# Altium PCB xvf300_core_board.PcbDoc
Units mm, origin at the board's own origin, x right, y up, seen from the top; angles counter-clockwise.
Board outline 76.54 x 75.31 mm, 2 copper layers (Top Layer, Bottom Layer); 154 components, 112 nets, 583 pads, 283 vias.
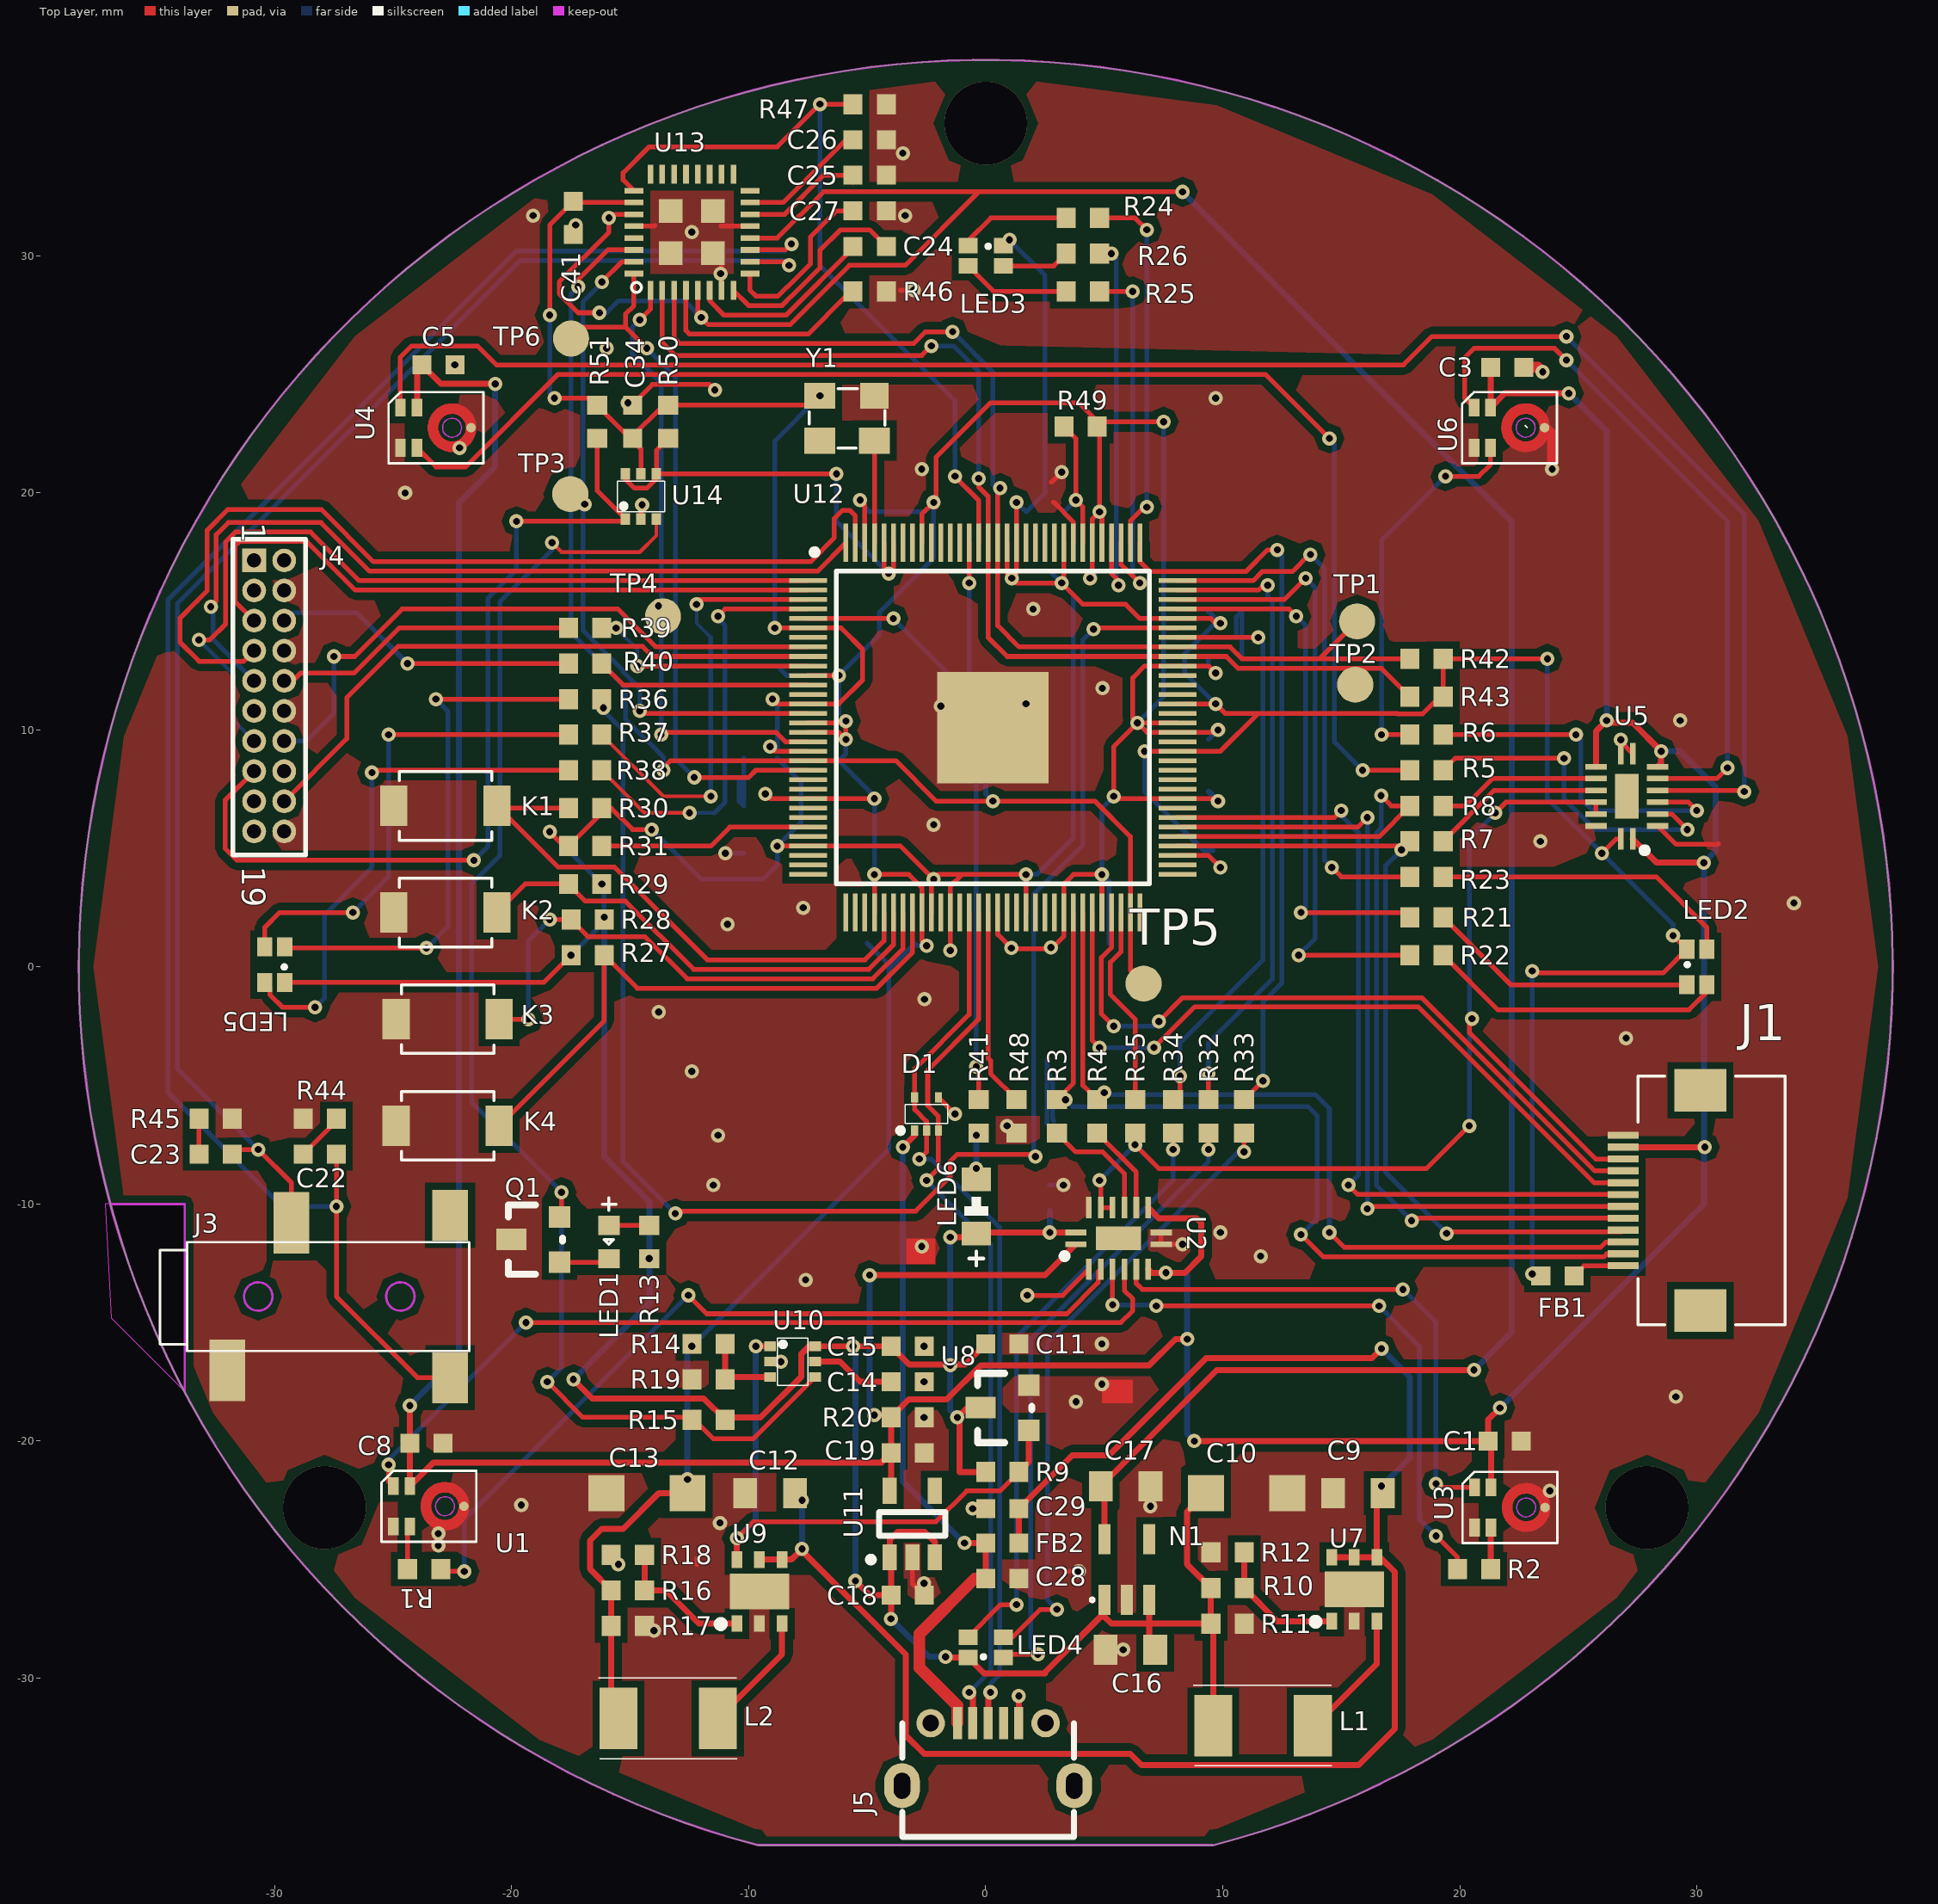
[diagram p0: Top Layer view]
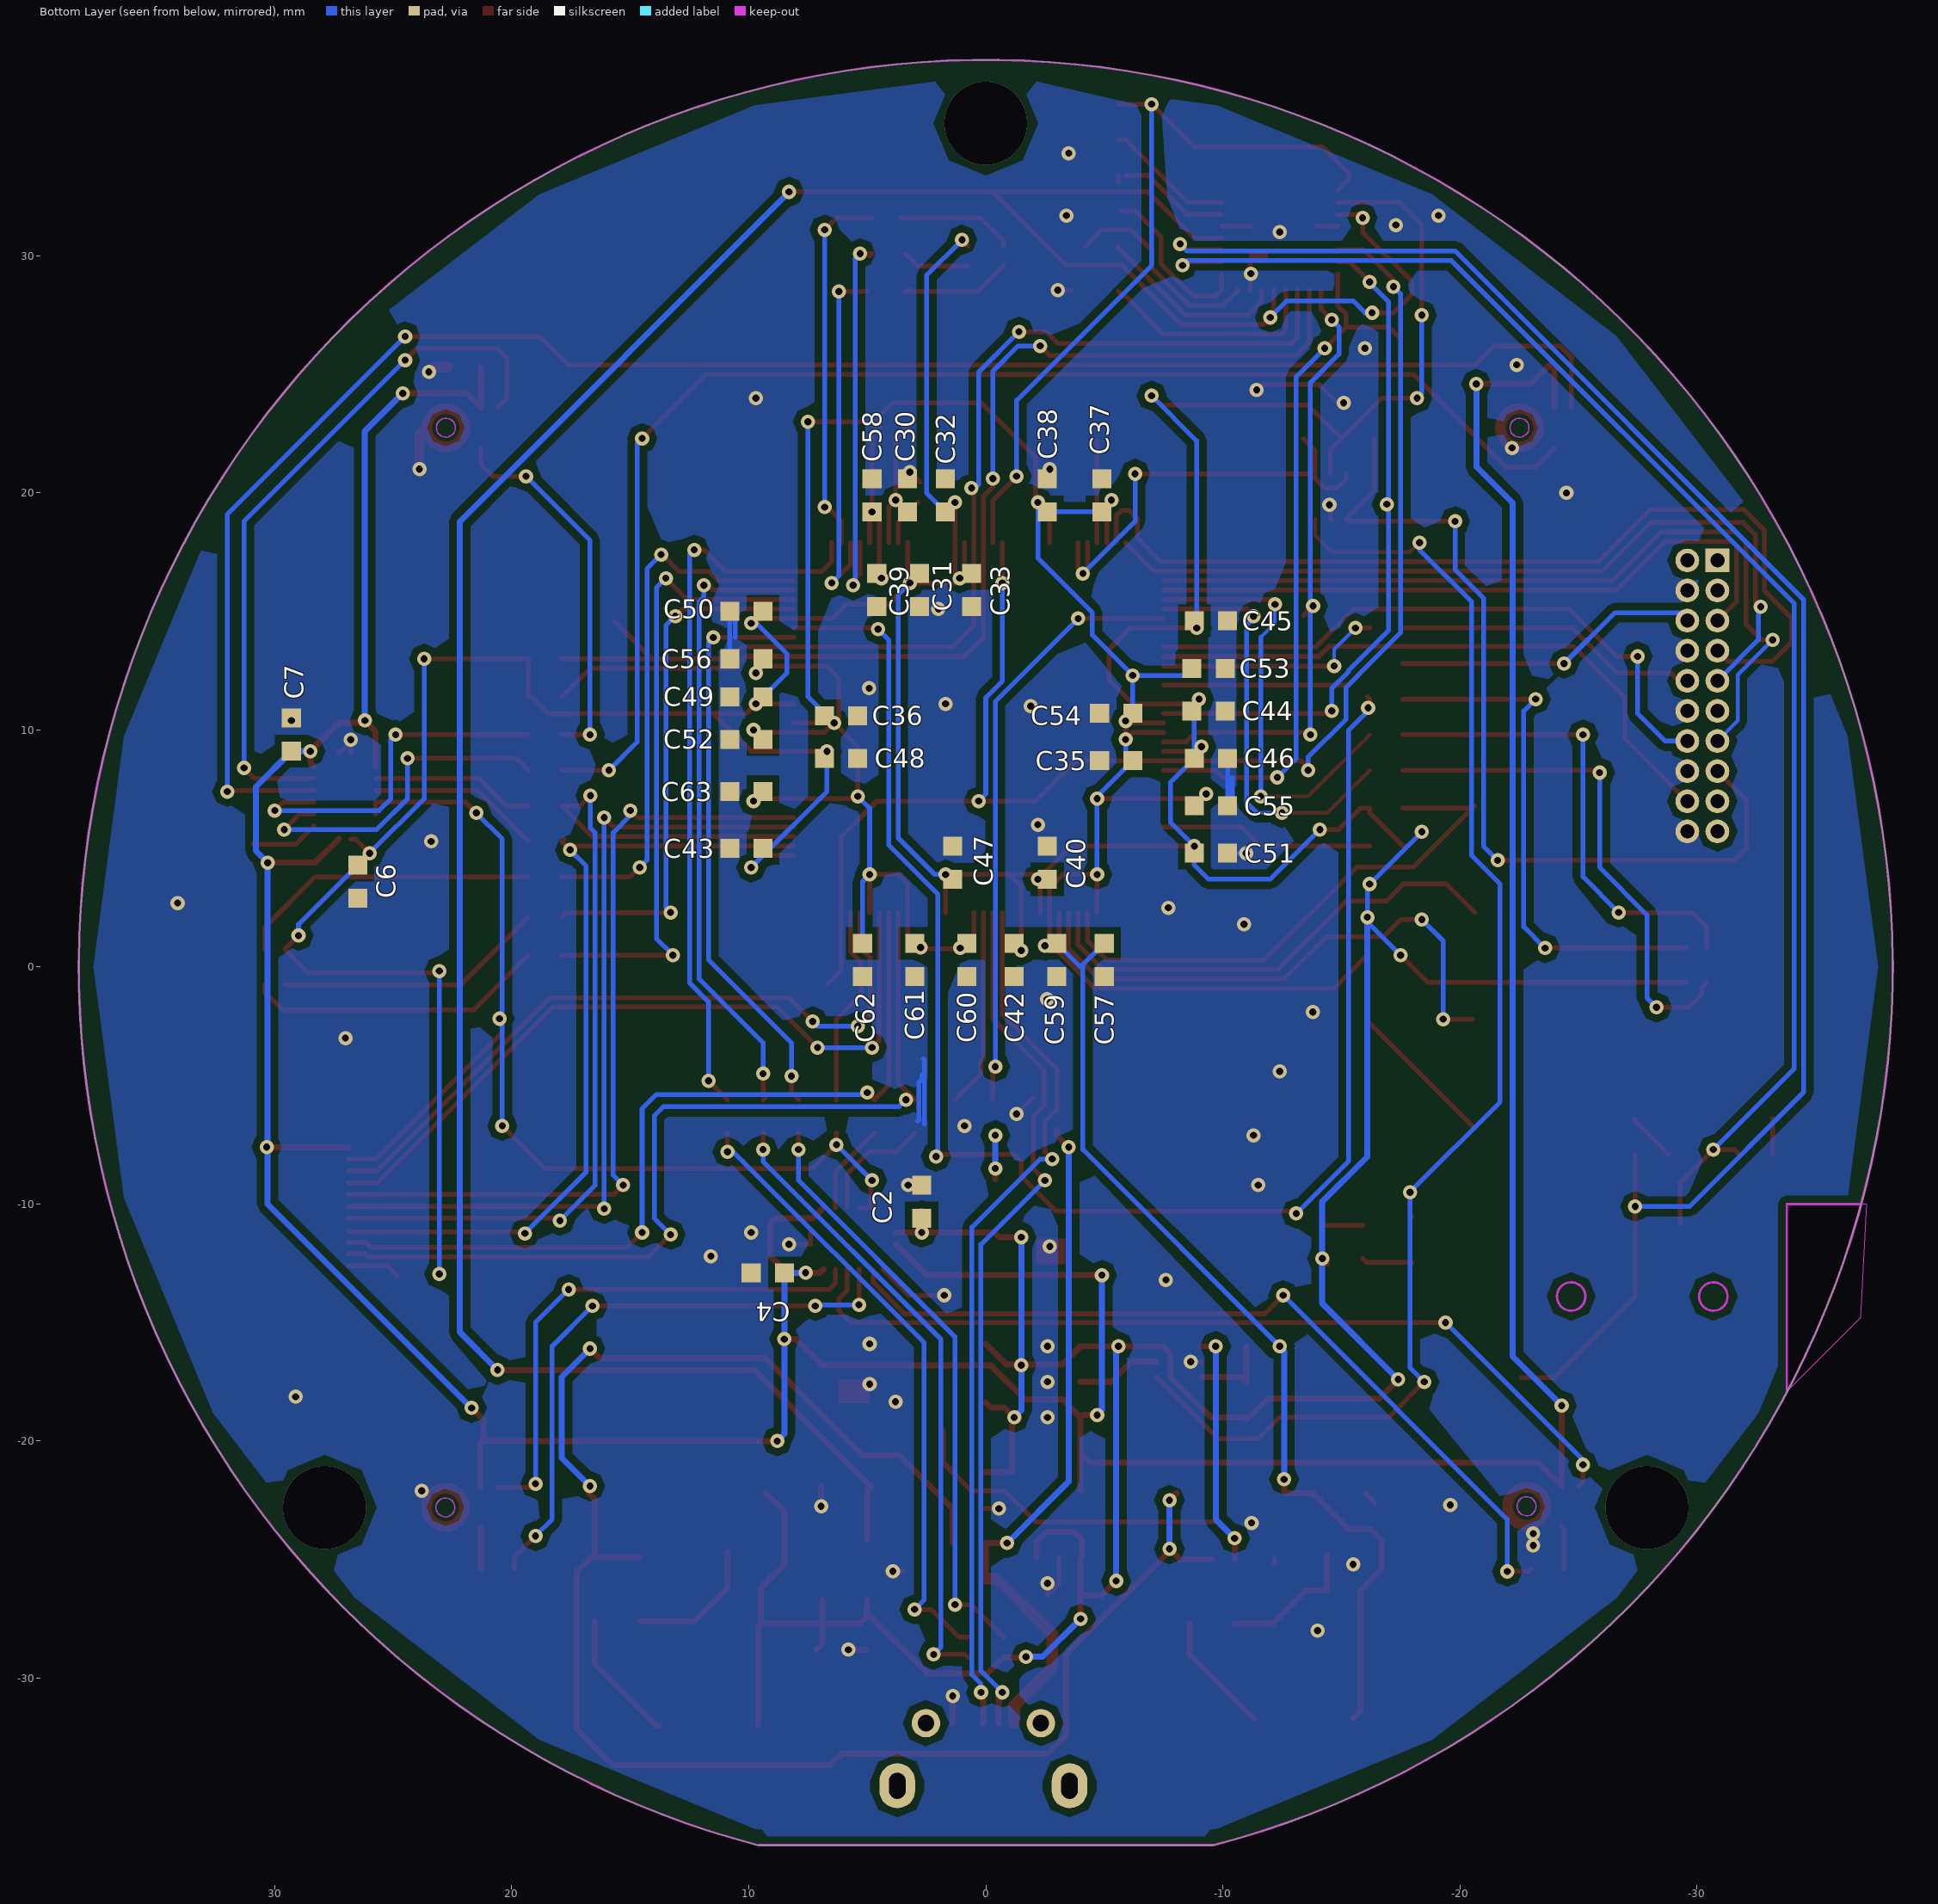
[diagram p1: Bottom Layer view, seen from below]

## Layer stack, top to bottom
Top Layer: signal copper 0.0356
Dielectric: dielectric 0.32, FR-4, Dk 4.8
Bottom Layer: signal copper 0.0356

## Board outline
-9.611,-37.043 cw(c0,0) 9.601,-37.046 9.601,-37.043
cut-out: -33.8,-10 -37.16,-10 -36.9,-14.8 -33.8,-17.9

## Design rules (kind name [scope] priority, off if disabled: settings)
Clearance [All] p1: gap=0.15
PolygonConnect [All] p1: connectstyle=Direct reliefconductorwidth=0.254 reliefentries=4 polygonreliefangle="90 Angle"
RoutingVias [All] p1: holewidth=0.3 width=0.6 viastyle="Through Hole" minholewidth=0.3 minwidth=0.6 maxholewidth=0.711 maxwidth=1.27
SilkscreenOverComponentPads SilkToSolderMaskClearance [IsPad] p1: minsilkscreentomaskgap=0.254
SolderMaskExpansion [All] p1: expansion=0.102
Width Width_5V [InNet('5V') or InNet('3V3')  or InNet('1V0') or InNet('2V5')  or InNet('1V8') or InNet('VBUS')] p1: maxlimit=1 minlimit=0.2 preferedwidth=0.5 minimp=50.000000 maximp=50.000000 favimp=50.000000
Width [All] p2: maxlimit=1 minlimit=0.152 preferedwidth=0.254 minimp=50.000000 maximp=50.000000 favimp=50.000000
27 further rules are at their usual default settings.

## Classes and differential pairs
component class TopLevel: C28 C29 C30 C31 C32 C33 C34 C35 C36 C37 C38 C39 C40 C41 C42 C43 C44 C45 C46 C47 C48 C49 C50 C51 C52 C53 C54 C55 C56 C57 C58 C59 C60 C61 C62 C63 D1 FB2 J4 J5 R48 R49 R50 R51 U12 U14 Y1
component class U_Microphones: C1 C2 C3 C4 C5 C6 C7 C8 R1 R2 R3 R4 R5 R6 R7 R8 U1 U2 U3 U4 U5 U6
component class U_Power: C9 C10 C11 C12 C13 C14 C15 C16 C17 C18 C19 L1 L2 LED1 N1 Q1 R9 R10 R11 R12 R13 R14 R15 R16 R17 R18 R19 R20 U7 U8 U9 U10 U11
component class "U_Tile 0": FB1 J1 K1 K2 K3 K4 LED2 LED3 LED4 LED5 LED6 R21 R22 R23 R24 R25 R26 R27 R28 R29 R30 R31 R32 R33 R34 R35 R36 R37 R38 R39 R40 R41
component class "U_Tile 1": C22 C23 C24 C25 C26 C27 J3 R42 R43 R44 R45 R46 R47 TP1 TP2 TP3 TP4 TP5 TP6 U13

## Components (designator, comment, footprint, x,y, rotation, side; value= is the part's Value field where it differs from the comment)
C1 "1u" C0603 21.9,-20 r0 top
C2 "100n" C0603 2.7,-9.9 r90 bottom
C3 "1u" C0603 22,25.3 r0 top
C4 "100n" C0603 9.2,-12.9 r0 bottom
C5 "1u" C0603 -23.1,25.4 r0 top
C6 "100n" C0603 26.5,3.6 r270 bottom
C7 "100n" C0603 29.3,9.8 r90 bottom
C8 "1u" C0603 -23.6,-20.1 r0 top
C9 "4u7" C0805 15.7,-22.2 r180 top
C10 "22u" C1206 11,-22.2 r0 top
C11 "100n" C0603 0.7,-15.9 r0 top
C12 "4u7" C0805 -9.1,-22.2 r180 top
C13 "22u" C1206 -14.3,-22.2 r180 top
C14 "2n2" C0603 -3.3,-17.5 r0 top
C15 "100n" C0603 -3.3,-16 r0 top
C16 "2u2" C0805 6.1,-28.8 r180 top
C17 "2u2" C0805 5.9,-21.9 r0 top
C18 "1u" C0603 -3.3,-26.5 r0 top
C19 "1u" C0603 -3.3,-20.5 r0 top
C22 "22n" C0603 -28.1,-7.9 r0 top
C23 "22n" C0603 -32.5,-7.9 r0 top
C24 "2u2" C0603 -4.9,30.4 r0 top
C25 "1u" C0603 -4.9,33.4 r0 top
C26 "1u" C0603 -4.9,34.9 r0 top
C27 "2u2" C0603 -4.9,31.9 r0 top
C28 "100n" C0603 0.7,-25.8 r0 top
C29 "100n" C0603 0.7,-22.85 r180 top
C30 "100n" C0603 3.3,19.9 r90 bottom
C31 "100n" C0603 2.8,15.9 r270 bottom
C32 "100n" C0603 1.7,19.9 r90 bottom
C33 "100n" C0603 0.6,15.9 r270 bottom
C34 "100n" C0603 -14.9,23 r90 top
C35 "100n" C0603 -5.5,8.7 r0 bottom
C36 "100n" C0603 6.1,10.6 r180 bottom
C37 "100n" C0603 -4.9,19.9 r90 bottom
C38 "100n" C0603 -2.6,19.9 r90 bottom
C39 "100n" C0603 4.6,15.9 r270 bottom
C40 "100n" C0603 -2.6,4.4 r90 bottom
C41 "100n" C0603 -17.4,31.6 r270 top
C42 "100n" C0603 -1.2,0.3 r270 bottom
C43 "100n" C0603 10.1,5 r0 bottom
C44 "100n" C0603 -9.4,10.8 r180 bottom
C45 "100n" C0603 -9.5,14.6 r180 bottom
C46 "100n" C0603 -9.5,8.8 r180 bottom
C47 "100n" C0603 1.4,4.4 r90 bottom
C48 "100n" C0603 6.1,8.8 r180 bottom
C49 "100n" C0603 10.1,11.4 r0 bottom
C50 "100n" C0603 10.1,15 r0 bottom
C51 "100n" C0603 -9.5,4.8 r180 bottom
C52 "100n" C0603 10.1,9.6 r0 bottom
C53 "100n" C0603 -9.4,12.6 r180 bottom
C54 "100n" C0603 -5.5,10.7 r0 bottom
C55 "100n" C0603 -9.5,6.8 r180 bottom
C56 "100n" C0603 10.1,13 r0 bottom
C57 "100n" C0603 -5,0.3 r270 bottom
C58 "100n" C0603 4.8,19.9 r90 bottom
C59 "100n" C0603 -3,0.3 r270 bottom
C60 "100n" C0603 0.8,0.3 r270 bottom
C61 "100n" C0603 3,0.3 r270 bottom
C62 "100n" C0603 5.2,0.3 r270 bottom
C63 "100n" C0603 10.1,7.4 r0 bottom
D1 "TPD2E001" SOT-5X3 -3,-6.9 r0 top
FB1 "330R 1.2A" L0603 24.12,-13.03 r180 top
FB2 "120R 2A" L0603 0.7,-24.3 r0 top
J1 "CON12" FFC/SM0.5-2H12A 26.9,-12.6 r270 top
J3 "PJ-2008A-B" PJ-2008A-B -30.7,-13.9 r0 top
J4 "XTAG" MHDR2X10 -30.87,17.15 r270 top
J5 "USB_Micro" USB-MICRO5 0.1,-31.9 r180 top
K1 "KEY1" BUTTON6 -22.8,6.8 r180 top
K2 "KEY1" BUTTON6 -22.8,2.3 r180 top
K3 "KEY1" BUTTON6 -22.7,-2.2 r180 top
K4 "KEY1" BUTTON6 -22.7,-6.7 r180 top
L1 "2u2" L5.8X3.4 13.8,-32 r180 top
L2 "2u2" L5.8X3.4 -11.3,-31.7 r180 top
LED1 "LED" LED0603 -15.9,-11.6 r90 top
LED2 "GB-C19HE1WT-H" LED1615 30,0 r90 top
LED3 "GB-C19HE1WT-H" LED1615 0,30 r0 top
LED4 "GB-C19HE1WT-H" LED1615 0,-28.7 r180 top locked
LED5 "GB-C19HE1WT-H" LED1615 -30,0.1 r270 top locked
LED6 "LED" LED0805 -0.4,-10.1 r270 top
N1 "TLV70025" SOT-23-5 5,-26.7 r0 top
Q1 "BSS138" SOT-23 -19,-11.5 r0 top
R1 "33R" R0603 -23.7,-25.4 r0 top
R2 "33R" R0603 20.6,-25.4 r180 top
R3 "33R" R0603 3,-6.3 r90 top
R4 "33R" R0603 4.7,-6.3 r90 top
R5 "33R" R0603 18.6,8.3 r0 top
R6 "33R" R0603 18.6,9.8 r0 top
R7 "33R" R0603 18.6,5.3 r180 top
R8 "33R" R0603 18.6,6.8 r180 top
R9 "10k" R0603 0.7,-21.3 r0 top
R10 "18k" R0603 10.2,-26.2 r0 top
R11 "2k2" R0603 10.2,-27.7 r0 top
R12 "5k6" R0603 10.2,-24.7 r0 top
R13 "470R" R0603 -14.2,-11.6 r90 top
R14 "3k9" R0603 -11.7,-15.9 r0 top
R15 "10k" R0603 -11.7,-19.1 r180 top
R16 "4k7" R0603 -15.1,-26.3 r0 top
R17 "1k" R0603 -15.1,-27.8 r0 top
R18 "18k" R0603 -15.1,-24.8 r0 top
R19 "10k" R0603 -11.7,-17.4 r180 top
R20 "10k" R0603 -3.3,-19 r0 top
R21 "220R" R0603 18.6,2.1 r180 top
R22 "220R" R0603 18.6,0.5 r180 top
R23 "220R" R0603 18.6,3.8 r180 top
R24 "220R" R0603 4.1,31.6 r0 top
R25 "220R" R0603 4.1,28.5 r0 top
R26 "220R" R0603 4.1,30.1 r0 top
R27 "4K7" R0603 -16.8,0.5 r180 top
R28 "4K7" R0603 -16.8,2 r0 top
R29 "4K7" R0603 -16.9,3.5 r0 top
R30 "4K7" R0603 -16.9,6.7 r0 top
R31 "4K7" R0603 -16.9,5.1 r180 top
R32 "220R" R0603 9.4,-6.3 r90 top
R33 "220R" R0603 10.9,-6.3 r90 top
R34 "220R" R0603 7.9,-6.3 r90 top
R35 "33R" R0603 6.3,-6.3 r270 top
R36 "220R" R0603 -16.9,11.3 r0 top
R37 "220R" R0603 -16.9,9.8 r0 top
R38 "220R" R0603 -16.9,8.3 r0 top
R39 "33R" R0603 -16.9,14.3 r0 top
R40 "33R" R0603 -16.9,12.8 r0 top
R41 "220R" R0603 -0.3,-6.3 r90 top
R42 "4k7" R0603 18.6,13 r0 top
R43 "4k7" R0603 18.6,11.4 r0 top
R44 "51R" R0603 -28.1,-6.4 r0 top
R45 "51R" R0603 -32.5,-6.4 r180 top
R46 "10k" R0603 -4.9,28.5 r180 top
R47 "10k" R0603 -4.9,36.4 r180 top
R48 "43R2" R0603 1.3,-6.3 r90 top
R49 "4R7" R0603 4,22.8 r0 top
R50 "10k" R0603 -13.4,23 r90 top
R51 "10k" R0603 -16.4,23 r90 top
TP1 "TP" TP1 15.67,14.58 r0 top
TP2 "TP" TP1 15.59,11.91 r90 top
TP3 "TP" TP1 -17.53,19.95 r90 top
TP4 "TP" TP1 -13.62,14.79 r90 top
TP5 "TP" TP1 6.66,-0.7 r90 top
TP6 "TP" TP1 -17.5,26.51 r90 top
U1 "IM69D130" "IM69D130 - DUPLICATE"#1 -25,-21.9 r0 top
U2 "FXL4TD245" DQFN16 3.8,-11.7 r0 top
U3 "IM69D130" "IM69D130 - DUPLICATE"#1 20.62,-21.95 r0 top
U4 "IM69D130" "IM69D130 - DUPLICATE"#1 -24.7,23.6 r0 top
U5 "FXL4TD245" DQFN16 27.3,5.4 r90 top
U6 "IM69D130" "IM69D130 - DUPLICATE"#2 20.6,23.6 r0 top
U7 "ST1S06" DFN6D 14.6,-27.6 r0 top
U8 "STM1061N28WX" SOT-23 0.8,-18.6 r0 top
U9 "ST1S06" DFN6D -10.5,-27.7 r0 top
U10 "ADM1085" SC70-6 -9.1,-16 r270 top
U11 "LP5907MFX-1.8" LC-SOT-23-5 -3.1,-23.5 r270 top
U12 "XVF3000-TQ128-C" "LQFP-128 - VSS" -7.5,16.3 r0 top locked
U13 "CS43L21" QFN-32 -12.4,31 r90 top
U14 "NC7WZ07" SC70-6 -15.2,18.9 r0 top
Y1 "CRYSTAL3" JT3225 -7,22.2 r0 top

## Footprints (in the part's own frame and the unit in brackets; to place one, negate y for a bottom-side part, rotate by r counter-clockwise, add the part's x,y. Pads: shape width x height; smd on the part's side, far side on the other; paste and mask are expansions set on the pad)
BUTTON6 [mm]
  rect 1.15x1.7 smd: 1(-2.17,0) 2(2.18,0)
  silkscreen extent -1.95,-1.45 1.95,1.45, body extent -2.45,-1.45 2.45,1.45, height 2
C0603 [mm]
  rect 0.8x0.8 smd: 1(-0.7,0) 2(0.7,0)
  body extent -0.8,-0.4 0.8,0.4, height 0.6
C0805 [mm]
  rect 1x1.27 smd: 1(-1.05,0) 2(1.05,0)
  body extent -1,-0.62 1,0.63, height 0.78
C1206 [mil]
  rect 60x60 smd: 1(-67.5,0) 2(67.5,0)
  body extent -63,-33 63,33, height 67
DFN6D [mm]
  rect 0.45x0.7 smd mask+0.05: 1(0,0) 2(0.95,0) 3(1.9,0) 4(1.9,2.7) 5(0.95,2.7) 6(0,2.7)
  rect 2.5x1.5 smd mask+0.05: 7(0.95,1.35)
  silkscreen extent -0.73,-0.06 -0.64,0.02
DQFN16 [mm]
  rect 1.9x1 smd mask+0.05: 0(1.8,0.25)
  rect 0.9x0.24 smd: 1(0,0) 8(3.6,0) 9(3.6,0.5) 16(0,0.5)
  rect 0.24x0.9 smd: 2(0.55,-1.05) 3(1.05,-1.05) 4(1.55,-1.05) 5(2.05,-1.05) 6(2.55,-1.05) 7(3.05,-1.05) 10(3.05,1.55) 11(2.55,1.55) 12(2.05,1.55) 13(1.55,1.55) 14(1.05,1.55) 15(0.55,1.55)
  silkscreen extent -0.52,-0.55 -0.43,-0.45
FFC/SM0.5-2H12A [mm]
  rect 1.8x2.2 smd: 0(-7.4,3.248) 0(1.9,3.25)
  rect 0.3x1.3 smd: 1(0,0) 2(-0.5,0) 3(-1,0) 4(-1.5,0) 5(-2,0) 6(-2.5,0) 7(-3,0) 8(-3.5,0) 9(-4,0) 10(-4.5,0) 11(-5,0) 12(-5.5,0)
  silkscreen extent -8,0.62 2.5,6.82
"IM69D130 - DUPLICATE"#1 [mm] "Microphone"
  rect 0.45x0.75 smd mask+0.1: 1(0,0) 2(0.7,0) 3(0.7,-1.7) 4(0,-1.7)
  round 0.4 smd paste+0 mask+0: 5(2.98,-0.85)
  Top Layer circle w0.45: c2.18,-0.85 r0.805
  Keep-Out Layer circle w0.05: c2.18,-0.85 r0.4
  silkscreen extent -0.5,-2.35 3.5,0.65
"IM69D130 - DUPLICATE"#2 [mm] "Microphone"
  rect 0.45x0.75 smd mask+0.1: 1(0,0) 2(0.7,0) 3(0.7,-1.7) 4(0,-1.7)
  round 0.4 smd paste+0 mask+0: 5(2.98,-0.85)
  Top Layer circle w0.45: c2.18,-0.85 r0.805
  Top Layer lines w0.45: 1.375,-0.85 cw(c2.18,-0.85) 2.985,-0.85
  Keep-Out Layer circle w0.05: c2.18,-0.85 r0.4
  silkscreen extent -0.5,-2.35 3.5,0.65
JT3225 [mm]
  rect 1.3x1.1 smd: 1(0,0) 3(2.3,0) 4(0,1.9)
  rect 1.2x1.1 smd: 2(2.3,1.9)
  silkscreen extent -0.45,-0.3 2.75,2.2, body extent -0.5,-0.3 2.7,2.2, height 0.6
L5.8X3.4 [mm]
  rect 1.6x2.6 smd mask+0.05: 1(0,0) 2(4.2,0)
  silkscreen extent -0.8,-1.7 5.05,1.7
L0603 [mm]
  rect 0.8x0.8 smd: 1(-0.7,0) 2(0.7,0)
  body extent -0.8,-0.4 0.8,0.4, height 0.9
LC-SOT-23-5 [mm]
  rect 1.1x0.6 smd: 1(1.4,-0.95) 2(1.4,0) 3(1.4,0.95) 4(-1.4,0.95) 5(-1.4,-0.95)
  silkscreen extent -0.5,-1.87 1.62,1.4
LED0603 [mm] "LED0603"
  rect 0.8x0.9 smd: 1(0.7,0) 2(-0.7,0)
  silkscreen extent -0.1,-0.3 1.86,0.28, body extent -0.85,-0.45 0.85,0.45, height 0.9
LED0805 [mm]
  rect 1x1.25 smd: 1(1.143,0) 2(-1.143,0)
  silkscreen extent -0.4,-0.5 2.5,0.5, body extent -1.01,-0.63 1.01,0.62, height 1.1
LED1615 [mm]
  rect 0.8x0.65 smd: 1(-0.75,0.425) 2(-0.75,-0.425) 3(0.75,-0.425) 4(0.75,0.425)
  silkscreen extent 0.02,0.32 0.18,0.48, body extent -0.8,-0.75 0.8,0.75, height 0.34
"LQFP-128 - VSS" [mm]
  rect 1.6x0.2 smd: 1(0,0) 2(0,-0.4) 3(0,-0.8) 4(0,-1.2) 5(0,-1.6) 6(0,-2) 7(0,-2.4) 8(0,-2.8) 9(0,-3.2) 10(0,-3.6) 11(0,-4) 12(0,-4.4) 13(0,-4.8) 14(0,-5.2) 15(0,-5.6) 16(0,-6) 17(0,-6.4) 18(0,-6.8) 19(0,-7.2) 20(0,-7.6) 21(0,-8) 22(0,-8.4) 23(0,-8.8) 24(0,-9.2) 25(0,-9.6) 26(0,-10) 27(0,-10.4) 28(0,-10.8) 29(0,-11.2) 30(0,-11.6) 31(0,-12) 32(0,-12.4) 65(15.6,-12.4) 66(15.6,-12) 67(15.6,-11.6) 68(15.6,-11.2) 69(15.6,-10.8) 70(15.6,-10.4) 71(15.6,-10) 72(15.6,-9.6) 73(15.6,-9.2) 74(15.6,-8.8) 75(15.6,-8.4) 76(15.6,-8) 77(15.6,-7.6) 78(15.6,-7.2) 79(15.6,-6.8) 80(15.6,-6.4) 81(15.6,-6) 82(15.6,-5.6) 83(15.6,-5.2) 84(15.6,-4.8) 85(15.6,-4.4) 86(15.6,-4) 87(15.6,-3.6) 88(15.6,-3.2) 89(15.6,-2.8) 90(15.6,-2.4) 91(15.6,-2) 92(15.6,-1.6) 93(15.6,-1.2) 94(15.6,-0.8) 95(15.6,-0.4) 96(15.6,0)
  rect 0.2x1.6 smd: 33(1.6,-14) 34(2,-14) 35(2.4,-14) 36(2.8,-14) 37(3.2,-14) 38(3.6,-14) 39(4,-14) 40(4.4,-14) 41(4.8,-14) 42(5.2,-14) 43(5.6,-14) 44(6,-14) 45(6.4,-14) 46(6.8,-14) 47(7.2,-14) 48(7.6,-14) 49(8,-14) 50(8.4,-14) 51(8.8,-14) 52(9.2,-14) 53(9.6,-14) 54(10,-14) 55(10.4,-14) 56(10.8,-14) 57(11.2,-14) 58(11.6,-14) 59(12,-14) 60(12.4,-14) 61(12.8,-14) 62(13.2,-14) 63(13.6,-14) 64(14,-14) 97(14,1.6) 98(13.6,1.6) 99(13.2,1.6) 100(12.8,1.6) 101(12.4,1.6) 102(12,1.6) 103(11.6,1.6) 104(11.2,1.6) 105(10.8,1.6) 106(10.4,1.6) 107(10,1.6) 108(9.6,1.6) 109(9.2,1.6) 110(8.8,1.6) 111(8.4,1.6) 112(8,1.6) 113(7.6,1.6) 114(7.2,1.6) 115(6.8,1.6) 116(6.4,1.6) 117(6,1.6) 118(5.6,1.6) 119(5.2,1.6) 120(4.8,1.6) 121(4.4,1.6) 122(4,1.6) 123(3.6,1.6) 124(3.2,1.6) 125(2.8,1.6) 126(2.4,1.6) 127(2,1.6) 128(1.6,1.6)
  rect 4.7x4.7 smd mask+0.05: 129(7.8,-6.2)
  silkscreen extent 0.15,-12.8 14.4,1.32
MHDR2X10 [mm] "Connector; Header; 10x2 Position"
  rect 1x1 hole 0.6: 1(0,0)
  round 1 hole 0.6: 2(0,1.27) 3(1.27,0) 4(1.27,1.27) 5(2.54,0) 6(2.54,1.27) 7(3.81,0) 8(3.81,1.27) 9(5.08,0) 10(5.08,1.27) 11(6.35,0) 12(6.35,1.27) 13(7.62,0) 14(7.62,1.27) 15(8.89,0) 16(8.89,1.27) 17(10.16,0) 18(10.16,1.27) 19(11.43,0) 20(11.43,1.27)
  silkscreen extent -0.9,-0.9 12.43,2.17
PJ-2008A-B [mm]
  rect 1.5x2.6 smd: 1(-1.3,-3.11) 3(1.4,3.11)
  rect 1.5x2.15 smd: 2(8.1,-3.425) 4(8.1,3.425)
  Keep-Out Layer circle w0.1: c6,0 r0.6
  Keep-Out Layer circle w0.1: c0,0 r0.6
  silkscreen extent -4.14,-2.3 8.9,2.29
QFN-32 [mm]
  rect 0.8x0.24 smd: 1(-2.45,1.75) 2(-2.45,1.25) 3(-2.45,0.75) 4(-2.45,0.25) 5(-2.45,-0.25) 6(-2.45,-0.75) 7(-2.45,-1.25) 8(-2.45,-1.75) 17(2.45,-1.75) 18(2.45,-1.25) 19(2.45,-0.75) 20(2.45,-0.25) 21(2.45,0.25) 22(2.45,0.75) 23(2.45,1.25) 24(2.45,1.75)
  rect 0.24x0.8 smd: 9(-1.75,-2.45) 10(-1.25,-2.45) 11(-0.75,-2.45) 12(-0.25,-2.45) 13(0.25,-2.45) 14(0.75,-2.45) 15(1.25,-2.45) 16(1.75,-2.45) 25(1.75,2.45) 26(1.25,2.45) 27(0.75,2.45) 28(0.25,2.45) 29(-0.25,2.45) 30(-0.75,2.45) 31(-1.25,2.45) 32(-1.75,2.45)
  rect 1x1 smd: 33(-0.89,-0.89) 33(-0.89,0.89) 33(0.89,-0.89) 33(0.89,0.89)
  silkscreen extent -2.54,2.13 -2.12,2.55, body extent -2.51,-2.51 2.51,2.51, height 0.75
R0603 [mm]
  rect 0.8x0.85 smd: 1(-0.7,0) 2(0.7,0)
  body extent -0.8,-0.45 0.8,0.45, height 0.5
SC70-6 [mm]
  rect 0.4x0.5 smd mask+0.1: 1(0,0) 2(0.65,0) 3(1.3,0) 4(1.3,1.9) 5(0.65,1.9) 6(0,1.9)
  silkscreen extent -0.35,0.3 1.65,1.6
SOT-5X3 [mm]
  rect 0.3x0.45 smd mask+0.05: 1(0,0) 2(0.5,0) 3(1,0) 4(1,1.4) 5(0,1.4)
  silkscreen extent -0.7,-0.1 1.4,1.1
SOT-23 [mil]
  rect 36x36 smd: 1(40,-37.5) 2(40,37.5)
  rect 50x36 smd: 3(-40,0.5)
  silkscreen extent -45,-58 45,58, body extent -55,-57 49,61, height 43
SOT-23-5 [mm]
  rect 0.508x1.27 smd: 1(0,0) 2(0.95,0) 3(1.9,0) 4(1.9,2.565) 5(0,2.565)
  silkscreen extent -0.59,-0.08 -0.43,0.08, body extent -0.55,-0.2 2.45,2.8, height 1.5
TP1 [mil]
  round 60 smd: 1(0,0)
USB-MICRO5 [mil]
  rect 15x54 smd: 1(51,0) 2(25.5,0) 3(0,0) 4(-25.5,0) 5(-51,0)
  oval 59.06x74.8 hole 27.56 slot 43.31 at 90 deg: 6(-143,104) 7(143,104)
  round 47.24 hole 27.5: 8(95.5,0) 9(-95.5,0)
  silkscreen extent -143,0 143,189, body extent -161,-9 161,204, height 105

## Part data
C1 C2 C3 C4 C5 C6 C7 C8 C9 C10 C11 C12 C13 C14 C15 C16 C17 C18 C19 C22 C23 C24 C25 C26 C27 C28 C29 C30 C31 C32 C33 C34 C35 C36 C37 C38 C39 C40 C41 C42 C43 C44 C45 C46 C47 C48 C49 C50 C51 C52 C53 C54 C55 C56 C57 C58 C59 C60 C61 C62 C63: library part CAP, "Capacitor"
FB1 FB2: library part FB
J1: "Connector"
J4: library part MHDR2X10, "Header, 10-Pin, Dual row"
J5: library part USB_Micro_5S_B, "USB micro female SMT with 4 fixed foot"
K1 K2 K3 K4: library part BUTTON, "BUTTON"
L1 L2: library part L, "Inductor"
LED2 LED3 LED4 LED5: library part LED-1615, "LED RGB"
Q1: library part MOSFET-N, "N-Channel MOSFET"
R1 R2 R3 R4 R5 R6 R7 R8 R9 R10 R11 R12 R13 R14 R15 R16 R17 R18 R19 R20 R21 R22 R23 R24 R25 R26 R27 R28 R29 R30 R31 R32 R33 R34 R35 R36 R37 R38 R39 R40 R41 R42 R43 R44 R45 R46 R47 R48 R49 R50 R51: library part R, "RES"
U7 U9: "The ST1S06xx is a step down DC-DC converter  optimized for powering low-voltage digital core in  HDD applications and, generally, to replace the  high current linear solution when the power  dissipation may cause an high heating of the  application environment. It provides up to 1.5 A  over an input voltage range of 2.7 V to 6 V. An high  switching frequency (1.5 MHz) allows the use of  tiny surface-mount components: as well as the  resistor divider to set the output voltage value,  only an inductor and two capacitors are required"

## Via types
v1: diameter 0.6, hole 0.3, Top Layer to Bottom Layer, 280 vias
v2: diameter 3.5, hole 3.5, Top Layer to Bottom Layer, 3 vias

## Nets (pads, with @x,y where several pads share a name; then routed paths per layer and width w, separated by ;. In a path a pad name is that pad's centre, name@x,y a point inside that pad or via, vN(x,y) a via of type N, cw(c..) or ccw(c..) an arc to the next point about the centre after c; other vN are vias at no path point)
1V0: C13.1 C35.1 C36.1 C37.1 C38.1 C39.1 C52.1 C53.1 C54.1 C55.1 C56.1 C57.1 C58.1 C59.1 C60.1 C61.1 C62.1 C63.1 L2.2 R14.1 R16.1 R17.1 R49.2 U12.11 U12.16 U12.17 U12.24 U12.36 U12.41 U12.49 U12.56 U12.60 U12.73 U12.80 U12.81 U12.87 U12.101 U12.102 U12.120 U12.126 | length 157.1
  Top Layer w0.2: v1(-9.3,7.3) -9.1,7.1 U12.24 v1(-4.7,7.1) ; U12.17 -6.2,9.9 v1(-5.9,9.6) v1(-5.9,10.376) -5.976,10.3 U12.16 ; U12.11 v1(-6.2,12.3) ; v1(-5.3,19.7) -5.1,19.5 U12.126 ; U12.36 v1(-4.7,3.9) -3.249,3.9 -2.7,3.351 U12.41 -2.7,1.1 v1(-2.5,0.9) ; U12.120 -2.7,19.1 v1(-2.2,19.6) v1@-2.15,19.65 ; v1@-2.1,19.4 -2.1,21.5 0.2,23.8 3.921,23.8 4.7,23.021 R49.2@4.479,22.8 ; U12.49 0.5,1.376 1.116,0.76 2.76,0.76 3.3,1.3 U12.56 3.3,3.5 3.7,3.9 v1(4.9,3.9) U12.60 ; v1(4.4,16.4) 4.5,16.5 U12.102 4.5,18.9 v1(4.8,19.2) ; R49.2 4.9,23 v1(7.5,23) ; R49.2@4.8,22.4 v1(4.8,19.2) ; U12.101 4.9,19.1 v1(4.8,19.2) ; U12.81 v1(6.4,10.3) ; v1(9.7,12.4) 9.4,12.7 U12.87 6.7,12.7 6.2,12.2 6.2,10.5 v1(6.4,10.3) ; v1(9.8,7) 9.7,7.1 U12.73 5.5,7.1 v1(5.4,7.2) 5.4,9.3 v1(6.4,10.3) ; v1(9.8,10) 9.7,9.9 U12.80 6.8,9.9 v1(6.4,10.3)
  Top Layer w0.254: L2.2 -15.8,-31.4 R17.1 R16.1 -16.7,-25.4 -16.7,-24.2 -16.2,-23.7 -15.3,-23.7 -13.8,-22.2 C13.1 v1(-12.585,-21.615)
  Bottom Layer w0.2: v1(-12.4,-16) -4.1,-7.7 -4.1,0.1 C57.1 ; C53.1 -8.4,12.3 v1(-6.2,12.3) ; C54.1 v1(-6.2,12.3) ; v1(-5.9,9.6) -5.9,9 C35.1 -4.7,7.2 v1(-4.7,7.1) v1(-4.7,3.9) ; v1(-5.3,19.7) -5.3,19.6 C37.1 C38.1 v1(-2.2,19.6) -2.2,17.249 -4.5,14.949 -4.5,14 v1(-6.2,12.3) ; -4,0 C59.1 -2.9,0.9 v1(-2.5,0.9) ; v1(4.4,16.4) C39.1 ; C62.1 5.2,3.6 v1(4.9,3.9) 4.9,6.7 v1(5.4,7.2) ; v1(6.4,10.3) 7.5,11.4 v1(7.5,23) ; C52.1 v1(9.8,10) ; C56.1 9.4,12.7 v1(9.7,12.4)
  Bottom Layer w0.254: v1(-12.585,-21.615) -12.585,-16.185 v1(-12.4,-16) ; C63.1 v1(9.8,7)
  other v1: 1.08,0.8 2.75,0.82
1V8: C1.1 C3.1 C4.1 C5.1 C7.1 C8.1 C19.1 J1.11 R20.1 U1.2 U2.1 U2.7 U2.10 U3.2 U4.2 U5.1 U5.7 U5.10 U6.2 U11.5 | length 203
  Top Layer w0.254: v1(-24.3,-18.5) C8.1 U1.2 -23.3,-20.9 -4.4,-20.9 C19.1 ; U4.2 -24,25.2 C5.1 -23,24.6 v1(-20.7,24.6) ; v1(-4.9,-13) 2.5,-13 U2.1 ; v1(-4.7,-18.9) -4.1,-18.9 R20.1 ; U11.5 -4,-22.05 C19.1 ; U2.7 7,-12.9 v1(7.6,-12.9) 8.4,-12.9 9.1,-12.2 9.1,-10.8 8.9,-10.6 7.3,-10.6 U2.10 ; v1(8.5,-15.7) 8,-15.7 6.9,-16.8 -0.2,-16.8 -1.648,-18.248 -3.248,-18.248 R20.1 ; v1(8.8,-20) C1.1 ; C3.1 U6.2 21.9,24.2 v1(24.6,24.2) ; U3.2 21.32,-20.12 C1.1 ; v1(21.7,-18.6) 21.2,-19.1 C1.1 ; U5.10 25.75,9.95 v1(26.2,10.4) 26.3,10.3 27.3,10.3 v1(28.5,9.1) 28.5,8.6 U5.7 ; J1.11 v1(30.34,-7.6) v1@30.4,-7.54 ; U5.1 28.3,4.4 v1(30.3,4.4) ; C19.1 R20.1
  Bottom Layer w0.254: v1(-24.3,-18.5) -22.227,-16.427 -22.227,19.573 -20.7,21.1 v1(-20.7,24.6) ; v1(-4.9,-13) -4.9,-18.7 v1(-4.7,-18.9) ; v1(7.6,-12.9) C4.1 v1(8.5,-15.7) 8.5,-19.7 v1(8.8,-20) ; v1(21.7,-18.6) 30.3,-10 v1(30.3,4.4) 30.8,4.9 30.8,7.6 C7.1 v1(28.5,9.1) ; v1(24.6,24.2) 26.2,22.6 v1(26.2,10.4)
2V5: C17.1 N1.5 U13.5 U13.12 U13.27 | length 122.4
  Top Layer w0.2: v1(-16.3,27.6) -17.2,27.6 -18,28.4 -18,28.9 -15.9,31 v1(-15.9,31.6) -15.75,31.75 U13.27 ; v1@-12.15,27.55 U13.5 ; v1(-12,27.4) -11.7,27.1 -8.254,27.1 -5.754,29.6 -3.4,29.6 -0.3,32.7 ; U13.12 -8.798,30.75 -6.848,32.7 -0.3,32.7 ; v1(8.3,32.7) -0.3,32.7
  Top Layer w0.254: N1.5 5,-22.05 C17.1 9.75,-17 v1(20.6,-17)
  Bottom Layer w0.2: v1(-16.3,27.6) -16,27.6 -15.5,28.1 -12.7,28.1 v1(-12,27.4)
  Bottom Layer w0.254: v1@8.293,32.693 22.2,18.787 22.2,-15.4 v1(20.6,-17)
3V3: C2.1 C6.1 C10.1 C11.1 C15.1 C16.1 C18.1 C31.1 C32.1 C33.1 C34.1 C40.1 C41.1 C42.1 C43.1 C44.1 C45.1 C46.1 C47.1 C48.1 C49.1 C50.1 C51.1 FB1.2 L1.2 LED2.4 LED3.4 LED4.4 LED5.4 LED6.1 N1.1 N1.3 R9.1 R10.1 R11.1 R13.1 R15.1 R27.2 R28.2 R29.2 R30.2 R31.2 R42.2 R43.2 R50.2 R51.2 U2.16 U5.16 U8.3 U10.6 U11.1 U11.3 U12.6 U12.14 U12.19 U12.29 U12.42 U12.44 U12.52 U12.67 U12.78 U12.83 U12.92 U12.105 U12.110 U12.111 U13.26 U14.5 Y1.4 | length 328.8
  Top Layer w0.2: LED5.4 -18.65,-0.65 v1(-17.5,0.5) ; v1(-18.4,5.7) -17.8,5.1 R31.2 -16.2,6.5 R30.2 -15.8,6.7 -14.9,5.8 v1(-14.1,5.8) ; v1(-18.4,27.5) -18.4,31.3 C41.1 -17.35,32.25 U13.26 ; v1(-18.2,24) -16.7,24 R51.2 C34.1@-15,22.3 ; U14.5 -14.55,21.85 C34.1@-15,22.3 ; v1@-9.2,9.2 v1(-9.1,9.3) -8.9,9.1 U12.19 ; v1(-9,11.3) -8.8,11.1 U12.14 -6.2,11.1 -5.2,12.1 -5.2,13.4 -6.1,14.3 U12.6 v1(-8.9,14.3) ; v1(-8.8,5.1) U12.29 -3.6,5.1 v1(-2.2,3.7) ; v1(-7,24.1) -7.4,23.7 R50.2 -13.6,23.7 C34.1@-15,22.3 ; U12.42 -2.3,3.6 v1(-2.2,3.7) ; v1(-1.5,0.7) U12.44 -1.5,3.4 -1,3.9 ; LED3.4 v1(1,30.675) ; U12.111 0.9,16.6 v1(1.1,16.4) 1.3,16.2 v1(3.2,16.2) ; v1@1.3,16.6 U12.110 v1(1.3,19.6) ; U12.52 v1(1.7,3.9) -1,3.9 ; U12.105 3.3,16.3 v1(3.2,16.2) ; v1(6.7,9.1) U12.78 9.9,9.1 11.5,10.7 ; U12.67 9.4,4.7 v1(9.9,4.2) ; U12.83 v1(9.7,11.1) 10.1,10.7 11.5,10.7 ; 9.024,14.7 9.141,14.7 ; v1(9.9,14.5) 9.7,14.5 9.5,14.7 U12.92 6.5,14.7 5.9,15.3 4.1,15.3 v1(3.2,16.2) ; v1(23.06,-0.17) 23.14,-0.25 28.575,-0.25 LED2.4 v1(29,1.325) ; v1(23.7,13) R42.2 R43.2 19.149,11.4 18.424,10.675 17.376,10.675 17.351,10.7 11.5,10.7 ; v1(26,4.8) 26.6,5.4 U5.16 ; v1(-2.2,3.7) -2,3.9 -1,3.9
  Top Layer w0.254: v1(-17.4,-17.4) -16.6,-18.2 -11.9,-18.2 R15.1 ; R13.1@-14.4,-12.5 v1(-14.2,-12.3) ; R15.1@-11,-19 -9.504,-19 -7.777,-17.273 -7.777,-16.315 -7.462,-16 U10.6 v1(-5.6,-16) C15.1 -3.227,-16.773 -0.873,-16.773 C11.1 ; v1(-5.5,-25.9) -4.9,-26.5 C18.1 ; v1(-4,-27.5) C18.1 ; U11.3 -2.15,-24.25 -2.573,-23.827 -3.727,-23.827 -4.05,-24.15 U11.1 -4,-24.95 C18.1 ; v1(-1.7,-29.1) -1.675,-29.125 LED4.4 -0.075,-29.8 2.5,-29.8 2.5,-29.753 N1.1@5,-27.253 ; v1(-1.5,-11.4) -0.557,-11.4 LED6.1 -0.357,-11.2 v1(2.7,-11.2) U2.16 ; R9.1 -1.1,-21.3 -1.1,-19.1 v1(-1.2,-19) -0.787,-18.587 U8.3 U8.3@0,-18.371 ; N1.1 N1.1@5,-27.253 ; N1.3 6.9,-27.7 ; C16.1 6.9,-28.55 6.9,-27.7 ; C10.1 8.5,-22.986 8.5,-25.2 R10.1 R11.1 ; L1.2 9.6,-27.8 R11.1 ; N1.1@5,-27.253 5,-27.4 5.3,-27.7 6.9,-27.7 ; 6.9,-27.7 R11.1
  Bottom Layer w0.2: v1(-18.4,5.7) v1(-16.2,3.5) -16.1,3.4 v1(-16.1,2.1) -16.1,1.9 v1(-17.5,0.5) ; v1(-18.4,27.5) -18.4,24.2 v1(-18.2,24) ; v1(-14.1,5.8) -12,3.7 -9.4,3.7 -8.8,4.3 C51.1 v1(-8.8,5.1) -7.8,6.1 -7.8,7.8 C46.1 ; v1(-9,11.3) -8.8,11.1 C46.1@-8.8,9.2 ; v1(-8.9,14.3) -8.9,22.2 v1(-7,24.1) ; v1(1,30.675) 2.5,29.175 2.5,20 C32.1 v1(1.3,19.6) ; v1(1.7,3.9) 2.15,3.9 3.7,5.45 3.7,15.7 v1(3.2,16.2) ; C31.1 v1(3.2,16.2) ; v1@3.3,16.3 v1(3.2,16.2) ; v1(6.7,9.1) 6.7,7.4 v1(9.9,4.2) ; C43.1 9.5,4.9 C43.1@9.6,4.9 ; C50.1 v1(9.9,14.5) ; v1(9.7,11.1) C49.1 8.4,12.4 8.4,13.224 9.676,14.5 v1(9.9,14.5) ; v1(23.06,-12.95) v1(23.06,-0.17) ; v1(23.7,13) 23.7,7.1 v1(26,4.8) C6.1 29,1.8 v1(29,1.325)
  Bottom Layer w0.254: v1(-17.4,-17.4) -14.2,-14.2 v1(-14.2,-12.3) -14.2,-9.9 -16.1,-8 v1@-16.1,1.9 ; v1(-5.6,-16) -5.5,-16 v1(-5.5,-25.9) ; v1(-4,-27.5) -2.4,-29.1 v1(-1.7,-29.1) ; v1(-1.5,-11.4) v1(-1.5,-16.8) -1.5,-18.7 v1(-1.2,-19) ; v1(2.7,-11.2) C2.1@2.7,-10.3
5V: C9.1 C12.1 C29.1 FB2.2 U7.4 U7.5 U7.6 U9.4 U9.5 | length 74.6
  Top Layer w0.254: U9.5 U9.4 -8.2,-25 v1(-7.75,-24.55) -7.75,-24.637 -3.377,-29.01 -3.377,-32.423 -2.6,-33.2 6.1,-33.2 6.57,-33.67 15.73,-33.67 17.26,-32.14 17.26,-25.526 16.634,-24.9 U7.4 ; C12.1 v1(-7.75,-22.5) ; FB2.2 C29.1 3.65,-20.6 5.2,-20.6 9.3,-16.5 16.3,-16.5 v1(16.7,-16.1) ; U7.6 U7.5 U7.4 ; C9.1 16.5,-22.45 U7.4
  Bottom Layer w0.254: v1(-7.75,-24.55) v1(-7.75,-22.5) ; v1(16.7,-21.9) 17.893,-20.707 17.893,-17.293 v1(16.7,-16.1)
24M: U12.125 Y1.3 | length 4.3
  Top Layer w0.2: U12.125 Y1.3
BUT_A: K1.1 R30.1 U12.37 | length 23.5
  Top Layer w0.2: K1.1 K1.1@-20.53,6.7 ; R30.1 K1.1@-20.53,6.7 ; U12.37 -4.3,1.097 -5.097,0.3 -11.751,0.3 -15.676,4.225 -18.055,4.225 K1.1@-20.53,6.7
BUT_B: K2.1 R29.1 U12.38 | length 20.5
  Top Layer w0.2: K2.1 -19.43,3.5 R29.1 -17.6,3.475 -16.9,2.775 -15.2,2.775 -12.325,-0.1 -4.931,-0.1 -3.9,0.931 U12.38
BUT_C: K3.1 R28.1 U12.39 | length 23.8
  Top Layer w0.2: K3.1 v1(-19.3,-2.2) ; v1(-18.4,2) R28.1 -16.8,1.3 -16.8,1.275 -14.375,1.275 -12.6,-0.5 -4.766,-0.5 -3.5,0.766 U12.39
  Bottom Layer w0.2: v1(-19.3,-2.2) -19.3,1.1 v1(-18.4,2)
BUT_D: K4.1 R27.1 U12.40 | length 24.9
  Top Layer w0.2: K4.1 -16.1,-2.27 R27.1 -14.7,-0.9 -4.6,-0.9 -3.1,0.6 U12.40
DAC_RST_N: R47.2 U12.114 U13.25 | length 33.1
  Top Layer w0.2: U13.25 -15.3,33.2 -15.3,33.5 -14.2,34.6 -8.8,34.6 v1(-7,36.4) R47.2 ; v1(-1.3,20.7) -1.3,20.686 -0.3,19.686 U12.114
  Bottom Layer w0.2: v1(-7,36.4) -7,29.6 -1.3,23.9 v1(-1.3,20.7)
GND: C1.2 C2.2 C3.2 C4.2 C5.2 C6.2 C7.2 C8.2 C9.2 C10.2 C11.2 C12.2 C13.2 C14.2 C15.2 C16.2 C17.2 C18.2 C19.2 C25.2 C26.2 C27.2 C28.2 C29.2 C30.2 C31.2 C32.2 C33.2 C34.2 C35.2 C36.2 C37.2 C38.2 C39.2 C40.2 C41.2 C42.2 C43.2 C44.2 C45.2 C46.2 C47.2 C48.2 C49.2 C50.2 C51.2 C52.2 C53.2 C54.2 C55.2 C56.2 C57.2 C58.2 C59.2 C60.2 C61.2 C62.2 C63.2 D1.4 J1.12 J3.1 J4.4 J4.8 J4.12 J4.16 J4.20 J5.5 K1.2 K2.2 K3.2 K4.2 N1.2 Q1.3 R11.2 R12.1 R17.2 R18.1 R19.2 R20.2 R44.1 R45.1 R46.1 R47.1 R48.1 U1.4 U1.5 U2.2 U2.8 U2.9 U2.15 U3.4 U3.5 U4.4 U4.5 U5.2 U5.8 U5.9 U5.15 U6.4 U6.5 U7.2 U7.7 U8.2 U9.2 U9.7 U10.2 U11.2 U12.104 U12.129 U13.7 U13.13 U13.28 U13.33 U14.2 Y1.2 | length 45
  Top Layer w0.2: C13.2@-16.414,-22.6 C13.2 ; C34.2 -14.9,23.74 -14.07,24.57 -11.66,24.57 v1(-11.43,24.34) ; U13.28 -13.99,31.25 -13.97,31.27 ; U14.2@-14.6,18.85 U14.2 -14.55,19.45 v1(-14.5,19.5) ; -12.18,-25.2 -12.18,-24.94 ; U13.33@-11.51,30.11 -11.15,29.75 U13.7 ; -11.17,31.25 U13.13 ; U10.2 v1(-8.65,-16.65) ; -3.6,28.55 v1(-3.04,28.55) ; U11.2 -3.1,-26 C18.2 v1(-2.6,-26) ; v1@-2.7,-12 v1(-2.7,-11.79) ; D1.4 v1(-1.3,-6.2) ; v1(-0.55,-22.85) C29.2 ; v1(1.75,-13.85) 3.25,-13.85 U2.2 ; 2.77,20.45 v1(3.2,20.88) ; 2.86,19.61 3.7,18.77 U12.104 ; 3.48,-25.49 v1(3.92,-25.49) ; v1(4.9,-17.6) v1@4.9,-17.4 ; 5.5,-17.9 5.6,-17.9 ; U2.9 U2.8 v1(8.3,-11.7) ; U5.9 v1@26.8,9.5 ; v1(26.8,9.59) v1@26.8,9.5 ; U5.8@27.3,9.09 U5.8 v1@26.8,9.5 ; U5.2 29.13,5.17 30.88,5.17 30.91,5.2
  Top Layer w0.254: J5.5 v1(1.395,-30.757) v1@1.438,-30.714 ; C16.2 v1(5.8,-28.8) ; v1(6.95,-22.75) C17.2
  Top Layer w0.45: C3.2 23.3,25.3 v1(23.5,25.1) ; U6.5 23.596,22.75 23.9,22.446 v1(23.9,21)
  Bottom Layer w0.2: v1(-10.99,4.8) C51.2 ; -10.41,7.99 -10.41,7.01 C55.2 C46.2 ; v1(-2.59,-1.36) v1@-2.59,-1.14 ; 2.58,-6.62 2.58,-3.93 2.64,-3.87 ; C2.2 v1(3.28,-9.2) ; 2.7,-4.57 2.7,-4.74 2.82,-4.86 2.82,-6.44 2.87,-6.49 ; v1(4.92,11.76) v1@4.92,11.85 ; 10.578,13.9 10.578,14.778 C50.2 C56.2
  other v1: -14,-28 -15.5,-25.2 -23.1,-24.4 -23.1,-23.9 -11.215,-23.451 -19.6,-22.7 23.8,-22.1 -2.6,-19 3.81,-18.337 29.12,-18.13 -2.6,-17.5 -2.6,-16 4.9,-15.9 -7.6,-13.2 11.6,-12.2 9.9,-11.2 -11.5,-9.2 -11.3,-7.1 0.9,-6.7 -12.4,-4.4 27.02,-3 -13.8,-1.9 -10.9,1.8 -7.7,2.5 34.1,2.7 23.4,5.3 -2.2,6 29.3,10.4 -1.9,11 1.7,11.1 2,15.1 -24.5,20 -2.7,21 -22.2,21.9 -15.1,23.8 9.7,24 -22.4,25.4 -16,26.1 -11.19,29.25 -12.4,31 -17.3,31.3 -19.1,31.7 -3.4,31.7 -3.5,34.33
I2C_SCL: R42.1 TP1.1 U12.89 U12.112 U13.3 | length 47.6
  Top Layer w0.2: U13.3 -13.15,26.55 -12.9,26.3 -3.049,26.3 -2.549,26.8 v1(-1.4,26.8) ; v1(0.6,20.2) 0.5,20.1 U12.112 0.5,14.4 1.4,13.5 U12.89 9.356,13.5 10.314,13.5 10.814,13 14.09,13 ; TP1.1 14.09,13 ; R42.1 14.09,13
  Bottom Layer w0.2: v1(-1.4,26.8) 0.3,25.1 0.3,20.351 0.451,20.2 v1(0.6,20.2)
I2C_SDA: R43.1 TP2.1 U12.88 U12.113 U13.2 | length 46.6
  Top Layer w0.2: U13.2 -13.65,26.35 -13.1,25.8 -2.7,25.8 v1(-2.3,26.2) ; v1(-0.3,20.6) -0.3,20.251 0.1,19.851 U12.113 0.1,13.9 0.9,13.1 U12.88 10.149,13.1 10.649,12.6 16.7,12.6 R43.1
  Bottom Layer w0.2: v1(-2.3,26.2) -1.366,26.2 -0.3,25.134 v1(-0.3,20.6)
I2S_BCLK: TP3.1 U12.15 U13.31 | length 28.5
  Top Layer w0.2: v1(-16.2,28.9) -15.35,29.75 U13.31 ; v1(-14.6,10.8) -14.7,10.7 U12.15
  Bottom Layer w0.2: v1(-16.2,28.9) -16.2,28.851 -17,28.051 -17,14.2 -15.3,12.5 -15.3,12.451 -14.6,11.751 v1(-14.6,10.8)
  other v1: -16.92,19.52
I2S_DAC_DATA: TP6.1 U12.21 U13.32 | length 30
  Top Layer w0.2: TP6.1 -17.01,27 -15.2,27 ; U13.32 -14.85,27.899 -15.2,27.549 -15.2,27 ; v1(-14.3,26.1) -15.2,27 ; v1(-12.3,8) -10,8 -9.7,8.3 U12.21
  Bottom Layer w0.2: v1(-14.3,26.1) -13.1,24.9 -13.1,8.8 v1(-12.3,8)
I2S_LRCK: TP4.1 U12.18 U13.1 | length 27.1
  Top Layer w0.2: v1(-14.6,27.3) -14.15,27.75 U13.1 ; v1(-13.7,9.8) -13.6,9.9 -8.851,9.9 -8.451,9.5 U12.18 ; v1(-13.81,15.23) -13.81,15.26 -13.42,14.84 v1(-13.81,15.23)
  Bottom Layer w0.2: v1(-14.6,27.3) -14.9,27 -14.9,25.851 -13.7,24.651 v1(-13.7,9.8)
LED0: R21.2 U12.93 | length 22.6
  Top Layer w0.2: U12.93 12.8,15.1 v1(13.1,14.8) ; v1(13.3,2.3) 17.7,2.3 R21.2
  Bottom Layer w0.2: v1(13.1,14.8) 13.5,14.4 13.5,2.5 v1(13.3,2.3)
LED1: R22.2 U12.94 | length 26.8
  Top Layer w0.2: U12.94 12.6,15.5 v1(13.5,16.4) ; v1(13.2,0.5) R22.2
  Bottom Layer w0.2: v1(13.2,0.5) 13.9,1.2 13.9,16 v1(13.5,16.4)
LED2: R23.2 U12.96 | length 23.1
  Top Layer w0.2: U12.96 11.28,16.3 11.66,16.68 12.931,16.68 13.651,17.4 v1(13.7,17.4) ; v1(14.6,4.2) 15,3.8 R23.2
  Bottom Layer w0.2: v1(13.7,17.4) 14.3,16.8 14.3,4.5 v1(14.6,4.2)
LED3: R24.2 U12.98 | length 15.8
  Top Layer w0.2: R24.2 6.3,31.6 v1(6.8,31.1) ; U12.98 6.1,18.824 6.676,19.4 v1(6.8,19.4)
  Bottom Layer w0.2: v1(6.8,19.4) v1(6.8,31.1)
LED4: R25.2 U12.99 | length 15.7
  Top Layer w0.2: R25.2@5,28.5 v1(6.2,28.5) ; U12.99 5.7,16.976 5.876,16.8 5.9,16.8 v1(6.5,16.2)
  Bottom Layer w0.2: v1(6.2,28.5) 6.2,16.5 v1(6.5,16.2)
LED5: R26.2 U12.100 | length 16.7
  Top Layer w0.2: R26.2@4.9,30 R26.2 v1(5.3,30.1) ; U12.100 5.3,16.6 5.6,16.3 v1(5.6,16.1)
  Bottom Layer w0.2: v1(5.3,30.1) 5.5,29.9 5.5,18.676 5.5,16.2 v1(5.6,16.1)
LED6: R32.2 U12.95 | length 26.9
  Top Layer w0.2: U12.95 11.5,15.9 11.7,16.1 v1(11.9,16.1) ; R32.2 9.3,-5.5 9.4,-5.4 v1(9.4,-4.5)
  Bottom Layer w0.2: v1(9.4,-4.5) 9.4,-3.2 12.1,-0.5 12.1,15.4 11.9,15.6 v1(11.9,16.1)
LED7: R33.2 U12.97 | length 31.1
  Top Layer w0.2: U12.97 6.5,17.11 6.93,16.68 10.97,16.68 11.89,17.6 v1(12.3,17.6) ; R33.2 v1(11.7,-4.8)
  Bottom Layer w0.2: v1(11.7,-4.8) 11.7,-1.466 12.5,-0.666 12.5,17.4 v1(12.3,17.6)
LED8: R34.2 U12.90 | length 24.6
  Top Layer w0.2: R34.2 8.2,-5.3 v1(8.2,-4.6) ; U12.90 9.521,13.9 10.148,13.9 ; 10.149,13.9 v1(11.5,13.9)
  Bottom Layer w0.2: v1(8.2,-4.6) 8.2,-3.2 11.7,0.3 11.7,13.7 v1(11.5,13.9)
LED9: R36.2 U12.91 | length 66.3
  Top Layer w0.2: R36.2 R36.2@-16.1,11.4 ; v1(-13.1,-10.4) -13,-10.3 -2.951,-10.3 -1.5,-8.849 -1.5,-8.2 -1.2,-7.9 2,-7.9 v1(2.1,-8) ; v1(4.55,14.25) 4.6,14.3 U12.91
  Bottom Layer w0.2: v1(-16.133,10.933) -16.133,10.819 -15.3,9.986 -15.3,-8.2 v1(-13.1,-10.4) ; v1(2.1,-8) 2.02,-7.92 2.02,3.064 4.09,5.134 4.09,13.79 v1(4.55,14.25)
LED10: R37.2 U12.3 | length 18.9
  Top Layer w0.152: R37.2 -13.6,7.2 v1(-11.6,7.2)
  Top Layer w0.2: v1(-12.2,15.3) -12.2,15.5 U12.3
  Bottom Layer w0.152: v1(-12.2,15.3) -12.2,14.5 -11.6,13.9
  Bottom Layer w0.2: v1(-11.6,7.2) -11.6,13.9
LED11: R38.2 U12.4 | length 18
  Top Layer w0.152: R38.2 -14.4,6.5 v1(-12.5,6.5)
  Top Layer w0.2: v1(-11.3,14.8) -11,15.1 U12.4
  Bottom Layer w0.152: v1(-12.5,6.5) -11.451,6.5
  Bottom Layer w0.2: -11.451,6.5 -11,6.951 -11,14.4 -11.3,14.7 v1(-11.3,14.8)
LED12: R41.2 U12.5 | length 25.4
  Top Layer w0.2: U12.5 v1(-3.9,14.7) ; v1(-0.4,-4.2) -0.3,-4.3 R41.2
  Bottom Layer w0.2: v1(-3.9,14.7) -0.4,11.2 v1(-0.4,-4.2)
MCLK_DAC: TP5.1 U12.20 U12.63 U12.115 U13.30 | length 64.3
  Top Layer w0.2: v1(-17.2,28.7) -17.2,29 -15.95,30.25 U13.30 ; v1(-13.6,8.3) -13.6,8.4 -13.3,8.7 U12.20 -3.8,8.7 -2.1,7 v1(0.3,7) 4.6,7 6.1,5.5 U12.63 6.1,-0.14 TP5.1 ; v1(-0.7,16.2) U12.115
  Bottom Layer w0.2: v1(-17.2,28.7) -17.5,28.4 -17.5,14.1 -15.7,12.3 -15.7,12.286 -15.2,11.786 -15.2,10.6 -15.2,10.451 -13.6,8.851 v1(-13.6,8.3) ; v1(-0.7,16.2) -0.7,12.066 0,11.366 0,7.3 v1(0.3,7)
MIC0_CLK: R1.1 U1.3 | length 1.8
  Top Layer w0.2: R1.1 -24.4,-23.7 U1.3
MIC0_DATA: J1.2 R3.2 U12.57 | length 38.8
  Top Layer w0.2: v1(3.37,-5.6) R3.2 3.7,-4.9 U12.57 ; v1(13.3,-11.29) 14.24,-12.23 26.074,-12.23 26.204,-12.1 J1.2
  Bottom Layer w0.2: v1(3.37,-5.6) 3.66,-5.89 13.6,-5.89 13.99,-6.28 13.99,-10.6 v1(13.3,-11.29)
MIC0_DATA_18: U1.1 U2.5 | length 37.1
  Top Layer w0.2: v1(-25.2,-21) -25.2,-21.7 U1.1 ; v1(-19.4,-15) 5.7,-15 6.2,-14.5 6.2,-14 5.85,-13.65 U2.5
  Bottom Layer w0.2: v1(-25.2,-21) -25.2,-20.8 v1(-19.4,-15)
MIC1_CLK: R2.1 U3.3 | length 1.8
  Top Layer w0.254: R2.1 21.3,-23.67 U3.3
MIC1_DATA: J1.3 R4.2 U12.58 | length 36.3
  Top Layer w0.2: U12.58 4.1,-5 R4.2 v1(5,-5.3) ; v1(14.5,-11.2) 15.12,-11.82 25.947,-11.82 26.167,-11.6 J1.3
  Bottom Layer w0.2: v1(5,-5.3) 5.08,-5.38 13.9,-5.38 14.5,-5.98 v1(14.5,-11.2)
MIC1_DATA_18: U2.6 U3.1 | length 22.4
  Top Layer w0.2: U2.6 6.35,-13.35 6.6,-13.6 v1(17.6,-13.6) ; v1(19,-21.8) 19.15,-21.95 U3.1
  Bottom Layer w0.2: v1(17.6,-13.6) 19,-15 v1(19,-21.8)
MIC2_CLK: R5.1 U4.3 | length 58.1
  Top Layer w0.2: U4.3 -23.2,21.1 -21.949,21.1 -18.049,25 11.8,25 v1(14.5,22.3) ; v1(15.9,8.3) R5.1
  Bottom Layer w0.2: v1(14.5,22.3) 14.7,22.1 14.7,9.5 v1(15.9,8.3)
MIC2_DATA: J1.4 R7.2 U12.68 | length 35.6
  Top Layer w0.2: U12.68 R7.2@17.7,5.1 ; v1(17.54,4.94) R7.2@17.7,5.1 ; R7.2@17.8,5.4 R7.2 R7.2@17.7,5.1 ; v1(19.45,-11.24) 19.52,-11.17 26.83,-11.17 J1.4
  Bottom Layer w0.2: v1(17.54,4.94) 16.86,4.26 16.86,-8.65 v1@19.32,-11.11 ; v1@19.32,-11.11 v1(19.45,-11.24) 19.32,-11.05 v1@19.32,-11.11
MIC2_DATA_18: U4.1 U5.5 | length 78.3
  Top Layer w0.2: U4.1 -24.7,25.724 -24.224,26.2 -21.45,26.2 -20.65,25.4 17.625,25.4 18.825,26.6 v1(24.5,26.6) ; U5.5 31.95,7.45 v1(32,7.4)
  Bottom Layer w0.2: v1(24.5,26.6) 32,19.1 v1(32,7.4)
MIC3_CLK: R6.1 U6.3 | length 16
  Top Layer w0.2: v1(16.7,9.8) R6.1 ; v1(19.4,20.7) 20.8,20.7 21.3,21.2 U6.3
  Bottom Layer w0.2: v1(16.7,9.8) 16.7,18 v1(19.4,20.7)
MIC3_DATA: J1.5 R8.2 U12.69 | length 39.3
  Top Layer w0.2: U12.69 16.6,5.5 R8.2 17.11,6.8 v1(16.68,7.23) ; v1(17.97,-10.7) 18.07,-10.6 J1.5
  Bottom Layer w0.2: v1(16.68,7.23) 16.68,5.86 16.48,5.66 16.48,-9.21 v1(17.97,-10.7)
MIC3_DATA_18: U5.6 U6.1 | length 30.1
  Top Layer w0.2: U6.1 20.2,24 20.2,25.7 20.6,26.1 24,26.1 v1(24.5,25.6) ; U5.6 30.85,7.95 v1(31.3,8.4)
  Bottom Layer w0.2: v1(24.5,25.6) 31.3,18.8 v1(31.3,8.4)
MIC4_DATA: J1.6 U12.70 | length 35.5
  Top Layer w0.2: U12.70 15.7,5.9 v1(16.1,6.3) ; v1(16.1,-10.2) 16.2,-10.1 J1.6
  Bottom Layer w0.2: v1(16.1,-10.2) v1(16.1,6.3)
MIC5_DATA: J1.7 U12.71 | length 35.1
  Top Layer w0.2: U12.71 14.7,6.3 v1(15,6.6) ; v1(15.3,-9.2) 15.7,-9.6 J1.7
  Bottom Layer w0.2: v1(15,6.6) 15,6.38 15.72,5.66 15.72,-8.78 v1(15.3,-9.2)
MIC6_DATA: J1.8 U12.59 | length 31.7
  Top Layer w0.2: U12.59 4.5,-3.1 v1(4.8,-3.4) ; v1(7.1,-3.4) 8.82,-1.68 18.243,-1.68 25.663,-9.1 J1.8
  Bottom Layer w0.2: v1(4.8,-3.4) v1(7.1,-3.4)
MIC7_DATA: J1.9 U12.61 | length 30.2
  Top Layer w0.2: U12.61 5.3,0.82 4.88,0.4 4.88,-1.98 v1(5.4,-2.5) ; v1(7.3,-2.3) 8.3,-1.3 18.4,-1.3 25.7,-8.6 J1.9
  Bottom Layer w0.2: v1(5.4,-2.5) 7.1,-2.5 v1(7.3,-2.3)
MIC_CLK: J1.10 R35.2 U2.13 U2.14 U5.13 U5.14 | length 47.5
  Top Layer w0.2: v1(4.8,-9) 4.85,-9.05 U2.14 U2.13 ; R35.2 v1(6.3,-7.5) 7.3,-8.5 18.6,-8.5 v1(20.4,-6.7) ; v1(20.52,-2.18) 20.41,-2.29 20.41,-2.773 25.737,-8.1 J1.10 ; v1(21.5,6.5) 21.95,6.95 U5.13 U5.14 U5.14@25.7,6.5
  Bottom Layer w0.2: v1(4.8,-9) v1(6.3,-7.5) ; v1(20.4,-6.7) 20.4,5.4 v1(21.5,6.5)
NetC14_1: C14.1 U10.5 | length 3.6
  Top Layer w0.254: U10.5 -6.15,-16.65 -5.3,-17.5 C14.1
NetC20_1: FB1.1 J1.1 | length 2.3
  Top Layer w0.2: FB1.1 25.24,-12.61 26.89,-12.61 J1.1
NetC22_1: C22.1 R44.2 | length 2.1
  Top Layer w0.2: C22.1 -27.4,-6.5 R44.2
NetC22_2: C22.2 J3.2 U13.11 | length 76.5
  Top Layer w0.2: C22.2 -27.4,-13.9 -23.975,-17.325 J3.2 ; U13.11 -8.45,30.25 v1(-8.2,30.5)
  Bottom Layer w0.2: v1(-27.4,-10.1) -29.7,-10.1 -34.509,-5.291 -34.509,15.501 -19.81,30.2 -8.5,30.2 v1(-8.2,30.5)
NetC23_1: C23.1 R45.2 | length 1.5
  Top Layer w0.2: C23.1 R45.2
NetC23_2: C23.2 J3.3 U13.10 | length 62.9
  Top Layer w0.2: C23.2 -31.6,-7.7 v1(-30.7,-7.7) -29.3,-9.1 J3.3 ; U13.10 -8.45,29.75 v1(-8.3,29.6)
  Bottom Layer w0.2: v1(-30.7,-7.7) -34.1,-4.3 -34.1,15.344 -19.644,29.8 -8.5,29.8 v1(-8.3,29.6)
NetC24_1: C24.1 U13.6 | length 8
  Top Layer w0.2: U13.6 -11.65,28.106 -11.044,27.5 -8.42,27.5 -5.6,30.32 C24.1
NetC24_2: C24.2 U13.8 | length 8.8
  Top Layer w0.2: U13.8 -10,27.9 -8.6,27.9 -8.2,28.3 -8.186,28.3 -7,29.486 -7,30.224 -6.124,31.1 -6,31.1 -4.9,31.1 C24.2
NetC25_1: C25.1 U13.14 | length 5
  Top Layer w0.2: U13.14 -8.484,31.75 -6.834,33.4 C25.1@-5.9,33.4 ; C25.1@-5.6,33.1 C25.1
NetC26_1: C26.1 U13.15 | length 5.4
  Top Layer w0.2: U13.15 -8.55,32.25 -5.9,34.9 C26.1
NetC27_1: C27.1 U13.9 | length 7.2
  Top Layer w0.2: U13.9 -9.95,28.55 -9.7,28.3 -8.766,28.3 -8.366,28.7 -8.351,28.7 -7.4,29.651 -7.4,30.8 -6.3,31.9 C27.1@-5.7,31.9
NetC30_1: C30.1 R49.1 U12.103 | length 5.9
  Top Layer w0.2: R49.1 3.8,22.3 v1(3.8,19.7) 4.1,19.4 U12.103
  Bottom Layer w0.2: C30.1 v1(3.8,19.7)
NetL1_1: L1.1 U7.3 | length 5.6
  Top Layer w0.254: L1.1 13.9,-32 16.5,-29.4 U7.3
NetL2_1: L2.1 U9.3 | length 5.1
  Top Layer w0.254: L2.1 -8.6,-29 U9.3
NetLED1_1: LED1.1 R13.2 | length 1.7
  Top Layer w0.2: LED1.1 R13.2
NetLED1_2: LED1.2 Q1.1 | length 2.1
  Top Layer w0.2: Q1.1 -16.053,-12.452 LED1.2
NetLED2_1: LED2.1 R21.1 | length 11.5
  Top Layer w0.2: R21.1 22.15,-0.75 LED2.1
NetLED2_2: LED2.2 R22.1 | length 12.7
  Top Layer w0.2: R22.1 21.6,-1.8 29.674,-1.8 30.425,-1.049 LED2.2
NetLED2_3: LED2.3 R23.1 | length 12.9
  Top Layer w0.2: R23.1 28.3,3.8 30.425,1.675 LED2.3
NetLED3_1: LED3.1 R24.1 | length 5
  Top Layer w0.2: LED3.1 -0.75,30.64 0.21,31.6 R24.1 R24.1@3.6,31.6
NetLED3_2: LED3.2 R25.1 | length 4.7
  Top Layer w0.2: LED3.2 0.325,28.5 R25.1@3.2,28.5 ; R25.1@3.2,28.6 R25.1@3.2,28.5 ; R25.1 R25.1@3.2,28.5
NetLED3_3: LED3.3 R26.1 | length 2.9
  Top Layer w0.2: LED3.3 2.875,29.575 R26.1
NetLED4_1: LED4.1 R32.1 | length 26.7
  Top Layer w0.2: LED4.1 0.875,-29 v1(2.2,-29) ; v1(9.4,-7.7) R32.1
  Bottom Layer w0.2: v1(2.2,-29) 1.89,-28.69 1.89,-15.71 9.4,-8.2 v1(9.4,-7.7)
NetLED4_2: LED4.2 R33.1 | length 26.6
  Top Layer w0.2: LED4.2 1.125,-28.275 2.3,-27.1 v1(3,-27.1) ; v1(10.9,-7.8) R33.1
  Bottom Layer w0.2: v1(3,-27.1) 2.6,-26.7 2.6,-15.849 10.249,-8.2 10.649,-7.8 v1(10.9,-7.8)
NetLED4_3: LED4.3 R34.1 | length 25.3
  Top Layer w0.2: LED4.3 0.625,-26.9 v1(1.3,-26.9) ; v1(7.9,-7.7) R34.1
  Bottom Layer w0.2: v1(1.3,-26.9) 1.3,-15.6 7.9,-9 v1(7.9,-7.7)
NetLED5_1: LED5.1 R36.1 | length 22.7
  Top Layer w0.2: LED5.1 -29.525,0.8 v1(-23.6,0.8) ; v1(-23.2,11.3) R36.1
  Bottom Layer w0.2: v1(-23.6,0.8) -22.7,1.7 -22.7,10.8 v1(-23.2,11.3)
NetLED5_2: LED5.2 R37.1 | length 20.5
  Top Layer w0.2: LED5.2 -30.425,1.675 -29.8,2.3 v1(-26.7,2.3) ; v1(-25.2,9.8) R37.1
  Bottom Layer w0.2: v1(-26.7,2.3) -25.2,3.8 v1(-25.2,9.8)
NetLED5_3: LED5.3 R38.1 | length 22
  Top Layer w0.2: LED5.3 -30.2,-0.875 -30.2,-1.174 -29.674,-1.7 v1(-28.3,-1.7) ; v1(-25.9,8.2) -25.8,8.3 R38.1
  Bottom Layer w0.2: v1(-28.3,-1.7) -27.9,-1.3 -27.9,2.2 -25.9,4.2 v1(-25.9,8.2)
NetLED6_2: LED6.2 R41.1 | length 1.9
  Top Layer w0.254: LED6.2 v1(-0.4,-8.5)
  Bottom Layer w0.254: v1(-0.4,-8.5) v1(-0.4,-7.1)
NetQ1_2: Q1.2 R15.2 U10.4 U14.3 | length 58.8
  Top Layer w0.152: v1(-18.3,17.9) -17.9,17.5 -14.6,17.5 -13.9,18.2 U14.3
  Top Layer w0.2: v1@-18.3,-17.5 v1(-18.5,-17.5) -17,-19 -12.4,-19 -11.5,-19.9 -9.8,-19.9 U10.4 ; Q1.2 -17.9,-10.463 v1(-17.9,-9.5)
  Bottom Layer w0.2: v1(-18.5,-17.5) -17.9,-16.9 v1(-17.9,-9.5) -21.7,-5.7 -21.7,3.5 -20.5,4.7 -20.5,15.4 -18.3,17.6 v1(-18.3,17.9)
NetR1_2: R1.2 U2.3 | length 35.4
  Top Layer w0.2: R1.2 -22.9,-25.5 v1(-22,-25.5) ; v1(-12.55,-13.85) -11.77,-14.63 3.422,-14.63 4.74,-13.312 4.74,-12.86 U2.3
  Bottom Layer w0.2: v1(-22,-25.5) -22,-23.3 v1(-12.55,-13.85)
NetR2_2: R2.2 U2.4 | length 25.3
  Top Layer w0.2: v1@5.3,-14.3 v1(5.35,-14.25) U2.4 ; v1(7.2,-14.3) v1(16.6,-14.3) ; v1(19,-24) 19.9,-24.9 R2.2
  Bottom Layer w0.2: v1(5.35,-14.25) 7.15,-14.25 v1(7.2,-14.3) ; v1(16.6,-14.3) 18.3,-16 18.3,-23.3 v1(19,-24)
NetR3_1: R3.1 U2.12 | length 5
  Top Layer w0.2: R3.1 3.8,-7.8 4.934,-7.8 5.85,-8.716 U2.12
NetR4_1: R4.1 U2.11 | length 3.8
  Top Layer w0.2: R4.1 6.35,-8.65 U2.11
NetR5_2: R5.2 U5.3 | length 14.3
  Top Layer w0.2: R5.2 19.8,8.8 v1(24.4,8.8) ; U5.3 28.95,6.45 v1(29.6,5.8)
  Bottom Layer w0.2: v1(24.4,8.8) 24.4,7.1 25.7,5.8 v1(29.6,5.8)
NetR6_2: R6.2 U5.4 | length 15.3
  Top Layer w0.2: R6.2 v1(24.9,9.8) ; U5.4 29.65,6.95 v1(30,6.6)
  Bottom Layer w0.2: v1(24.9,9.8) 25.1,9.6 25.1,7.1 25.6,6.6 v1(30,6.6)
NetR7_1: R7.1 U5.12 | length 7.3
  Top Layer w0.2: R7.1 21.45,7.45 U5.12
NetR8_1: R8.1 U5.11 | length 6.9
  Top Layer w0.2: R8.1 20.234,6.8 21.384,7.95 U5.11
NetR10_2: R10.2 R12.2 U7.1 | length 5.8
  Top Layer w0.254: R12.2 R10.2 12.3,-27.6 U7.1
NetR14_2: R14.2 R19.1 U10.3 | length 3.5
  Top Layer w0.254: R14.2@-11,-16 R19.1 -11,-17.5 -10.8,-17.3 U10.3
NetR16_2: R16.2 R18.2 U9.1 | length 6
  Top Layer w0.254: R18.2 R16.2 -13.5,-26.3 -12.1,-27.7 U9.1
NetR31_1: R31.1 U12.27 | length 9
  Top Layer w0.2: R31.1 -11.6,5.1 -10.8,5.9 U12.27
NetR35_1: R35.1 U12.62 | length 8.5
  Top Layer w0.2: U12.62 5.7,0.64 5.26,0.2 5.26,-1.16 6.3,-2.2 R35.1
NetR39_2: R39.2 U12.10 | length 9.8
  Top Layer w0.2: R39.2 v1(-15.6,14.3) ; v1(-14.7,12.7) U12.10
  Bottom Layer w0.152: v1(-15.6,14.3) -14.7,13.4 v1(-14.7,12.7)
NetR40_2: R40.2 U12.12 | length 9.1
  Top Layer w0.2: R40.2 -15.3,11.9 U12.12
NetR46_2: R46.2 U13.4 | length 9.5
  Top Layer w0.2: U13.4 -12.65,26.85 -12.5,26.7 -7.5,26.7 R46.2@-5.9,28.3 ; R46.2@-5.8,28.3 R46.2
NetR48_2: R48.2 U12.48 | length 8.4
  Top Layer w0.2: U12.48 0.1,-3.851 0.2,-3.951 0.2,-4.5 R48.2
PG_3V3: R9.2 U8.1 U9.6 U10.1 | length 24.9
  Top Layer w0.2: v1(-10.5,-24.1) -9.8,-23.4 -2.1,-23.4 -0.8,-22.1 0.6,-22.1 R9.2
  Top Layer w0.254: U9.6 v1(-10.5,-24.1) ; v1(-9.7,-16) U10.1 ; R9.2 1.816,-20.884 U8.1
  Bottom Layer w0.254: v1(-10.5,-24.1) -9.7,-23.3 v1(-9.7,-16)
RST_N: R50.1 U12.123 U12.124 U14.4 U14.6 | length 19.2
  Top Layer w0.2: U14.6 -15.2,20.576 -14.824,20.2 -14.304,20.2 -13.9,20.604 U14.4 ; R50.1 -13.9,21.8 U14.4 ; v1(-6.3,20.8) U14.4 ; U12.124 -4.3,16.8 v1(-4.1,16.6) -3.9,16.8 U12.123
  Bottom Layer w0.2: v1(-6.3,20.8) -6.3,18.8 v1(-4.1,16.6)
TCK: J4.9 U12.128 | length 35.2
  Top Layer w0.2: v1(-32.7,15.2) -32.47,15.43 -32.47,18.241 -31.961,18.75 -28.05,18.75 -26,16.7 -7.1,16.7 U12.128
  Bottom Layer w0.152: J4.9@-30.87,12.41 J4.9@-30.8,12.41
  Bottom Layer w0.2: v1(-32.7,15.2) -32.6,15.1 -32.6,13.8 J4.9
TDI: J4.5 U12.2 | length 28.6
  Top Layer w0.2: J4.5 -31.67,15.41 -31.67,17.774 -31.494,17.95 -28.65,17.95 -26.6,15.9 U12.2
TDO: J4.13 U12.1 | length 35.7
  Top Layer w0.2: v1(-33.2,13.8) -32.74,13.8 -32.07,14.47 -32.07,17.94 -31.66,18.35 -28.484,18.35 -26.434,16.3 U12.1
  Bottom Layer w0.152: v1(-33.2,13.8) -31.73,12.33 -31.73,10.39 J4.13
TMS: J4.7 U12.127 | length 40.4
  Top Layer w0.2: J4.7@-31.005,13.475 J4.7@-30.8,13.68 ; J4.7 -31.31,12.9 -33.2,12.9 -34,13.7 -34,14.72 -33.28,15.44 -32.85,15.87 -32.85,18.427 -31.977,19.3 -28.034,19.3 -25.834,17.1 -7.39,17.1 -6.389,18.101 -6.389,18.92 -6.054,19.255 -5.725,19.255 -5.5,19.03 U12.127
USB_DN: D1.3 J5.2 U12.47 | length 37
  Top Layer w0.2: v1(-2.5,-9) -2,-8.5 D1.3 -2,-6.299 -2.45,-5.849 -2.45,-4.35 -0.3,-2.2 U12.47
  Top Layer w0.254: v1(-0.7,-30.6) -0.548,-30.752 J5.2
  Bottom Layer w0.2: v1(-2.5,-9) 0.201,-11.701 0.201,-29.699 v1(-0.7,-30.6)
USB_DP: D1.2 D1.5 J5.3 U12.46 | length 37.4
  Top Layer w0.2: v1(-2.8,-8.1) -2.5,-7.8 D1.2 -2.5,-6.517 -3,-6.017 D1.5 -3,-4.3 -0.7,-2 U12.46
  Top Layer w0.254: J5.3 0.1,-30.7 v1(0.2,-30.6)
  Bottom Layer w0.2: v1(-2.8,-8.1) -2.3,-8.1 0.581,-10.981 0.581,-29.858 0.2,-30.239 v1(0.2,-30.6)
VBUS: C28.1 D1.1 FB2.1 J5.1 | length 29.3
  Top Layer w0.254: v1(-3.5,-7.6) -3,-7.1 D1.1 ; v1(-0.9,-24.3) FB2.1 C28.1
  Top Layer w0.5: J5.1 -1.195,-31.165 -2.8,-29.561 -2.8,-28.136 -0.464,-25.8 C28.1
  Bottom Layer w0.254: v1(-3.5,-7.6) -3.5,-21.7 v1(-0.9,-24.3)
X0D00: U12.30
X0D11: U12.32
X0D39: U12.7
XL_UN0: J4.14 U12.8 | length 26.5
  Top Layer w0.2: v1(-27.5,13.1) -26.63,13.1 -24.63,15.1 -15.518,15.1 -13.918,13.5 U12.8
  Bottom Layer w0.2: J4.14 -28.67,9.53 -27.5,10.7 v1(-27.5,13.1)
XL_UN1: J4.18 U12.9 | length 26
  Top Layer w0.2: J4.18 -26.96,9.63 -26.96,11.365 -24.8,13.525 -14.48,13.525 -14.055,13.1 U12.9
XL_UP0: J4.10 R39.1 | length 12.9
  Top Layer w0.2: J4.10 -29.24,12.07 -28.9,12.41 -26.641,12.41 -24.751,14.3 R39.1
XL_UP1: J4.6 R40.1 | length 12.8
  Top Layer w0.2: v1(-24.4,12.8) R40.1
  Bottom Layer w0.2: J4.6@-29.53,14.95 -26.55,14.95 v1(-24.4,12.8)
XSYS_RST_N: J4.15 R51.1 U14.1 | length 38.1
  Top Layer w0.2: J4.15 -32.1,7.03 -32.1,5 -31.6,4.5 v1(-21.6,4.5) ; v1(-19.8,18.8) -15.3,18.8 U14.1 -16.4,20.1 R51.1
  Bottom Layer w0.2: v1(-21.6,4.5) -21,5.1 -21,15.566 -19.8,16.766 v1(-19.8,18.8)
pads on no net: J1.0 J3.4 J4.1 J4.2 J4.3 J4.11 J4.17 J4.19 J5.4 J5.6 J5.7 J5.8 J5.9 N1.4 U2.0 U5.0 U11.4 U12.13 U12.22 U12.23 U12.25 U12.26 U12.28 U12.31 U12.33 U12.34 U12.35 U12.43 U12.45 U12.50 U12.51 U12.53 U12.54 U12.55 U12.64 U12.65 U12.66 U12.72 U12.74 U12.75 U12.76 U12.77 U12.79 U12.82 U12.84 U12.85 U12.86 U12.106 U12.107 U12.108 U12.109 U12.116 U12.117 U12.118 U12.119 U12.121 U12.122 U13.16 U13.17 U13.18 U13.19 U13.20 U13.21 U13.22 U13.23 U13.24 U13.29 Y1.1
copper on no net:
  other v2: -27.9,-22.8 27.9,-22.8 0,35.6

## Polygon pours and split planes (outlines as drawn)
GND on Bottom Layer "Bottom Layer-No Net" (solid, remove dead copper, pour order 3): -54.174,46.43 -53.547,45.84 61.15,45.84 61.15,-41.79 43.337,-58.55 42.71,-57.96 -36.362,-57.96 -36.362,-47.37 -63.24,-22.08 -63.24,-1.79 -63.24,16.73 -62.613,17.32 -58.234,21.44 -58.234,35.55 -58.234,43.49 -55.11,46.43 -53.239,46.43 -52.612,47.02
GND on Top Layer "Bottom Layer-No Net" (solid, remove dead copper, pour order 7): -49.31,46.86 -47.71,45.26 50.4,45.26 50.4,-47.78 43.72,-54.46 40.51,-51.25 -73.64,-51.25 -73.64,20.92 -49.84,44.72

## Keep-outs
Keep-Out Layer:
  lines w0.1: -36.9,-10 -33.8,-10 -33.8,-11.6 -33.8,-16.2 -33.8,-17.9 ; 9.601,-37.046 ccw(c0,0) -9.611,-37.043 9.601,-37.043

## Other copper
Top Layer:
  rectangle net GND: -3.36,-12.54 -2.12,-11.45
  rectangle net GND: -11.9,29.7 -11.1,30.3
  rectangle net GND: 4.9,-18.4 6.2,-17.4

## Silkscreen, mask and mechanical layers (free items; w line width, h text height)
Top Overlay:
  lines w0.05: 22.75,22.85 22.85,22.75

## Text inside footprints (layer, text, board x,y; h text height)
J4: Top Overlay "19" at -31.378,4.25 h1 r270; Top Overlay "1" at -31.378,18.75 h1 r270